# EAGLE board SparkFun_Analog_MEMS_Microphone_Breakout_VM2020-Panel (EAGLE 9.6.2), part 1 of 4
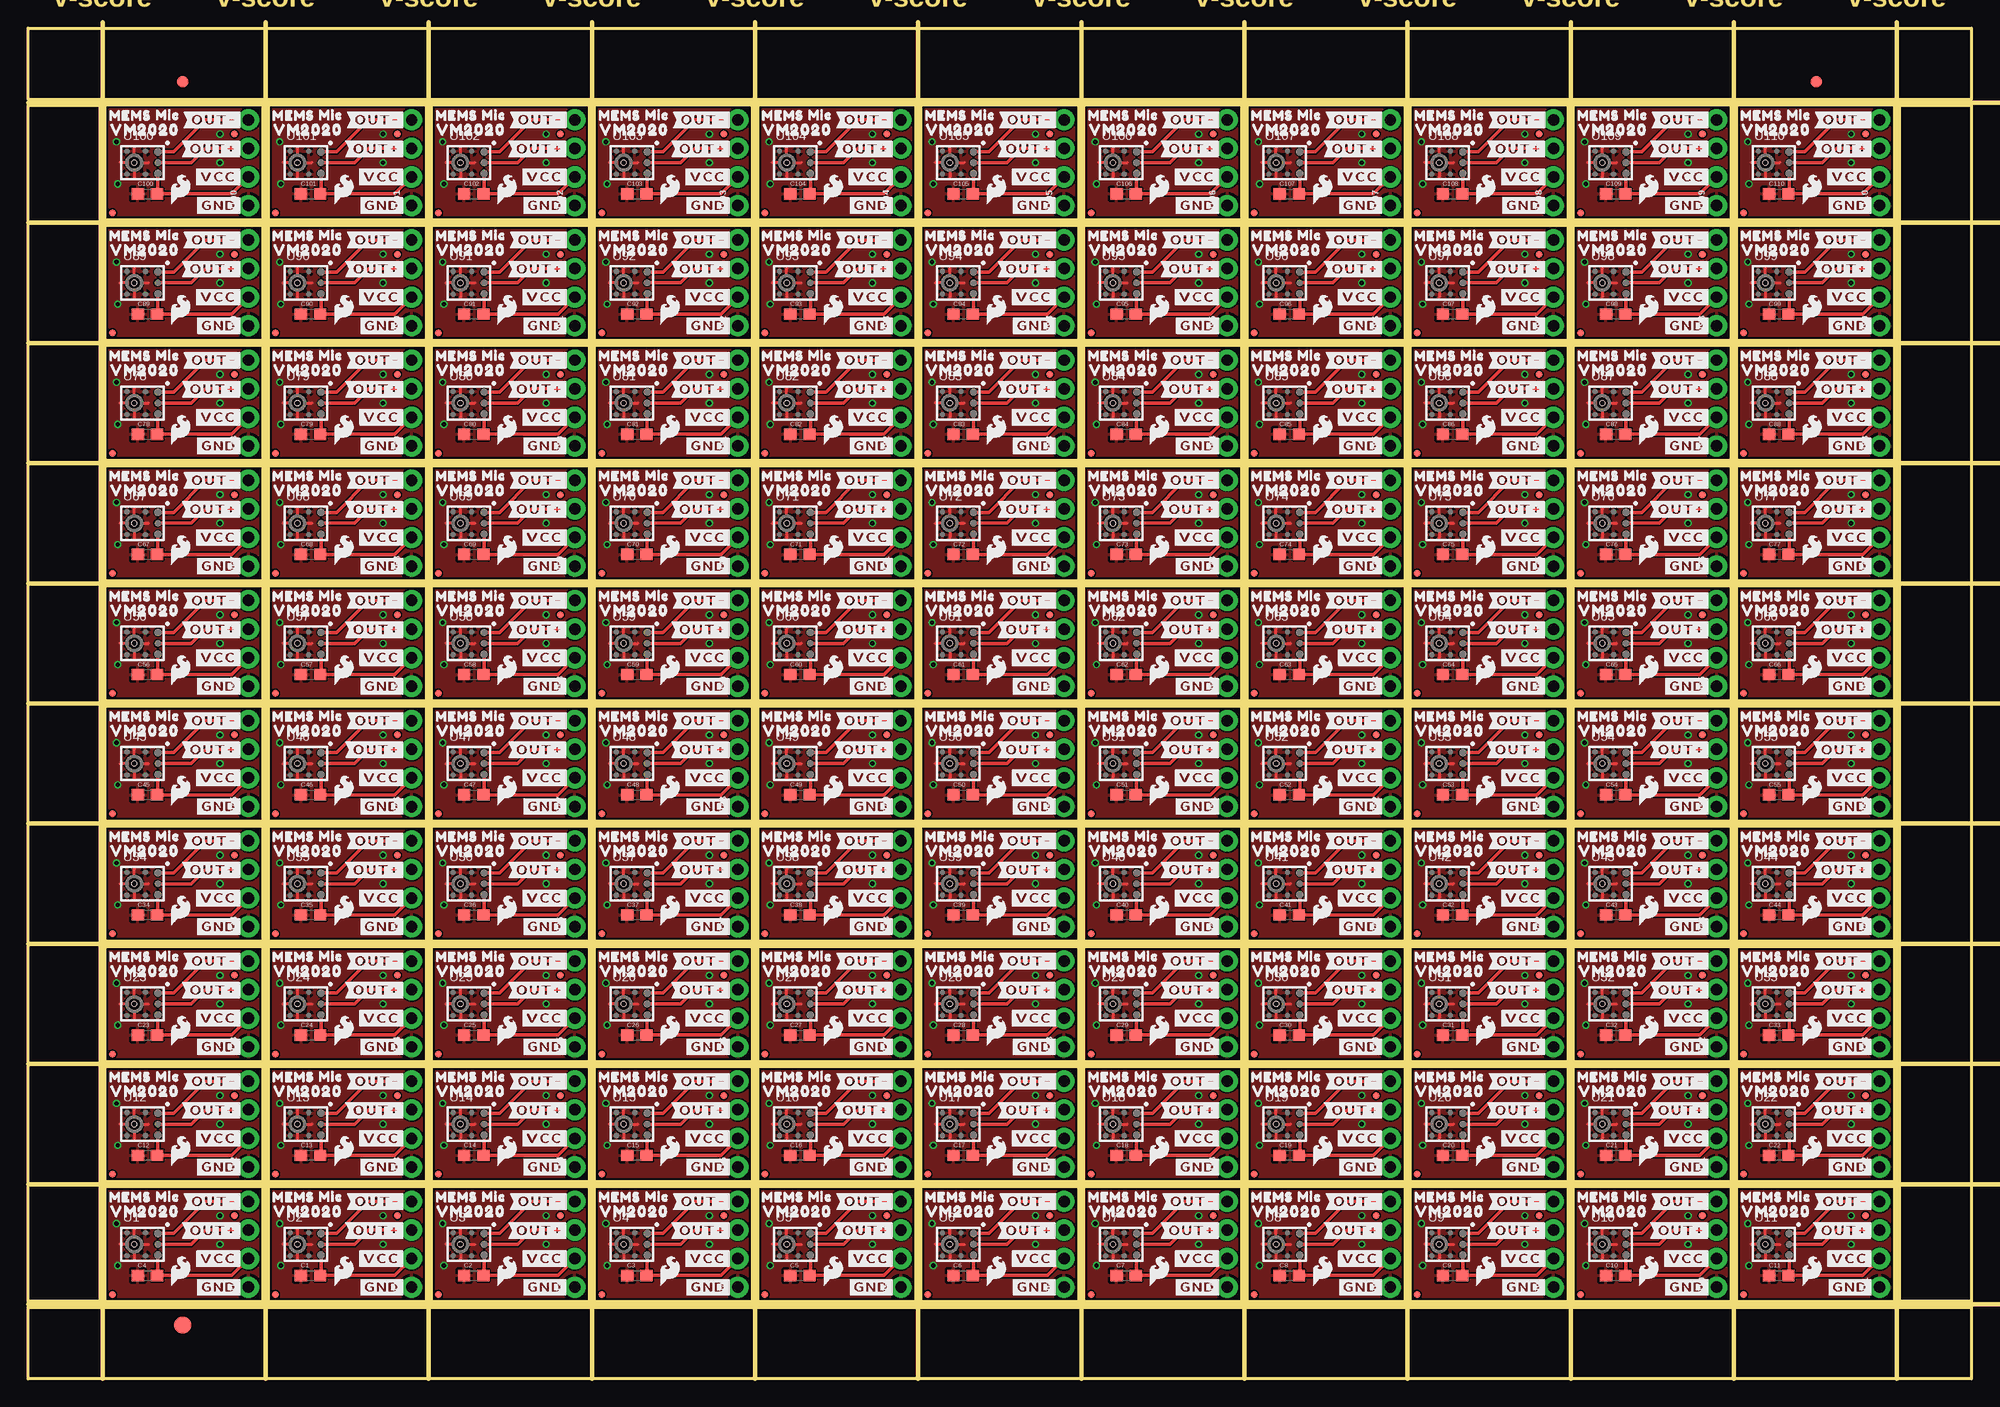
[diagram p0: board, top side]
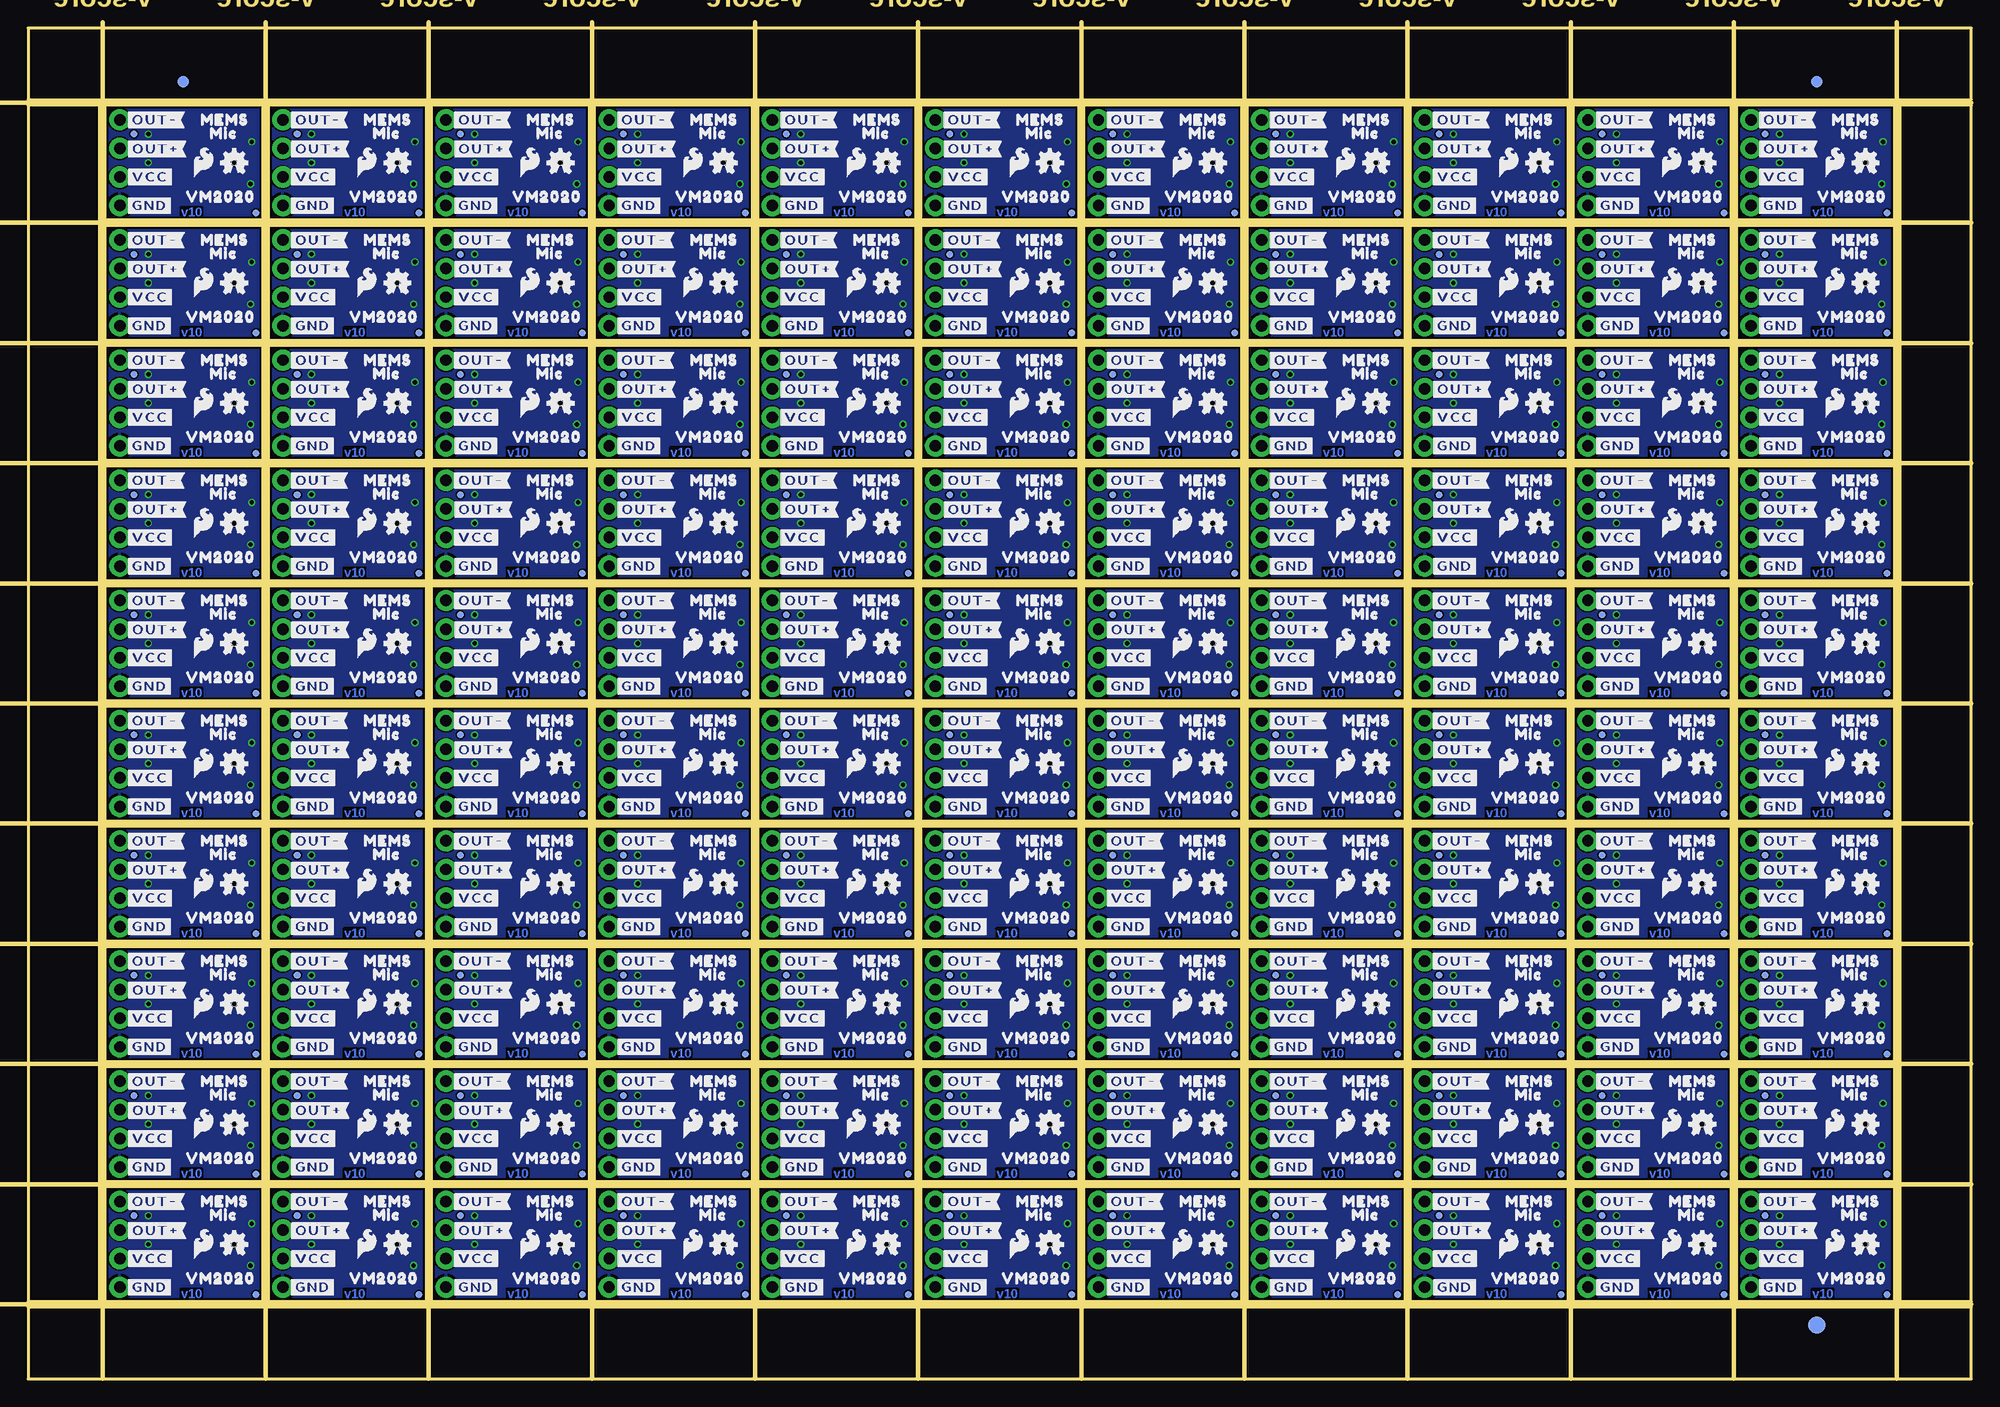
[diagram p1: board, bottom side, seen from below]

Size 172.47 x 119.89 mm. Coordinates in mm from the lower left corner, seen from the top.
Outline: 456 segments
Copper layers (1*16): Top 0.035mm / dielectric 1.5mm / Bottom 0.035mm
Design rules "SparkFun_Analog_MEMS_Microphone_Breakout_VM2020": minimum track width 5mil, minimum drill 0.3mm, track to track 5mil, track to pad 5mil, pad to pad 5mil, via to via 5mil, smd to smd 5mil, copper to edge 7mil, drill to drill 7mil, minimum pad ring 5mil, minimum via ring 5mil, stop-mask expansion 2.5mil, vias tented up to drill 25mil, thermal gap 10mil
Milling: 23 lines

## Footprints (pad centres in the part's own frame; a part is rotated, then mirrored left to right if it is on the bottom)
0603 = smd 1.1 x 1: 1 -0.85,0; 2 0.85,0
FIDUCIAL-1X2 = smd 1 x 1: 1 0,0
FIDUCIAL-1.5X3 = smd 1.5 x 1.5: 1 0,0
FIDUCIAL-MICRO = smd 0.635 x 0.635: 1 0,0
1X04_NO_SILK = drill 1.016 pad 1.88: 1 0,0; 2 2.54,0; 3 5.08,0; 4 7.62,0
VM2020 = smd 0.65 x 0.65: 1 1.35,0.965; 6 1.35,-0.965 | smd 0.46 x 0.46: 2 0.25,1.015; 3 -1.39,1.015; 4 -1.39,-1.015; 5 0.25,-1.015 | smd 0.6 x 0.6: 7 1.35,0 | smd 0.25 x 0.25: 8 -1.38,0 | hole 0.457: -0.75,0

## Placement (x,y rotation side)
C1  0.1uF  [0603]  25.07,9.17 0 top
C2  0.1uF  [0603]  39.55,9.17 0 top
C3  0.1uF  [0603]  54.03,9.17 0 top
C4  0.1uF  [0603]  10.59,9.17 0 top
C5  0.1uF  [0603]  68.5,9.17 0 top
C6  0.1uF  [0603]  82.98,9.17 0 top
C7  0.1uF  [0603]  97.46,9.17 0 top
C8  0.1uF  [0603]  111.94,9.17 0 top
C9  0.1uF  [0603]  126.42,9.17 0 top
C10  0.1uF  [0603]  140.89,9.17 0 top
C11  0.1uF  [0603]  155.37,9.17 0 top
C12  0.1uF  [0603]  10.59,19.84 0 top
C13  0.1uF  [0603]  25.07,19.84 0 top
C14  0.1uF  [0603]  39.55,19.84 0 top
C15  0.1uF  [0603]  54.03,19.84 0 top
C16  0.1uF  [0603]  68.5,19.84 0 top
C17  0.1uF  [0603]  82.98,19.84 0 top
C18  0.1uF  [0603]  97.46,19.84 0 top
C19  0.1uF  [0603]  111.94,19.84 0 top
C20  0.1uF  [0603]  126.42,19.84 0 top
C21  0.1uF  [0603]  140.89,19.84 0 top
C22  0.1uF  [0603]  155.37,19.84 0 top
C23  0.1uF  [0603]  10.59,30.51 0 top
C24  0.1uF  [0603]  25.07,30.51 0 top
C25  0.1uF  [0603]  39.55,30.51 0 top
C26  0.1uF  [0603]  54.03,30.51 0 top
C27  0.1uF  [0603]  68.5,30.51 0 top
C28  0.1uF  [0603]  82.98,30.51 0 top
C29  0.1uF  [0603]  97.46,30.51 0 top
C30  0.1uF  [0603]  111.94,30.51 0 top
C31  0.1uF  [0603]  126.42,30.51 0 top
C32  0.1uF  [0603]  140.89,30.51 0 top
C33  0.1uF  [0603]  155.37,30.51 0 top
C34  0.1uF  [0603]  10.59,41.17 0 top
C35  0.1uF  [0603]  25.07,41.17 0 top
C36  0.1uF  [0603]  39.55,41.17 0 top
C37  0.1uF  [0603]  54.03,41.17 0 top
C38  0.1uF  [0603]  68.5,41.17 0 top
C39  0.1uF  [0603]  82.98,41.17 0 top
C40  0.1uF  [0603]  97.46,41.17 0 top
C41  0.1uF  [0603]  111.94,41.17 0 top
C42  0.1uF  [0603]  126.42,41.17 0 top
C43  0.1uF  [0603]  140.89,41.17 0 top
C44  0.1uF  [0603]  155.37,41.17 0 top
C45  0.1uF  [0603]  10.59,51.84 0 top
C46  0.1uF  [0603]  25.07,51.84 0 top
C47  0.1uF  [0603]  39.55,51.84 0 top
C48  0.1uF  [0603]  54.03,51.84 0 top
C49  0.1uF  [0603]  68.5,51.84 0 top
C50  0.1uF  [0603]  82.98,51.84 0 top
C51  0.1uF  [0603]  97.46,51.84 0 top
C52  0.1uF  [0603]  111.94,51.84 0 top
C53  0.1uF  [0603]  126.42,51.84 0 top
C54  0.1uF  [0603]  140.89,51.84 0 top
C55  0.1uF  [0603]  155.37,51.84 0 top
C56  0.1uF  [0603]  10.59,62.51 0 top
C57  0.1uF  [0603]  25.07,62.51 0 top
C58  0.1uF  [0603]  39.55,62.51 0 top
C59  0.1uF  [0603]  54.03,62.51 0 top
C60  0.1uF  [0603]  68.5,62.51 0 top
C61  0.1uF  [0603]  82.98,62.51 0 top
C62  0.1uF  [0603]  97.46,62.51 0 top
C63  0.1uF  [0603]  111.94,62.51 0 top
C64  0.1uF  [0603]  126.42,62.51 0 top
C65  0.1uF  [0603]  140.89,62.51 0 top
C66  0.1uF  [0603]  155.37,62.51 0 top
C67  0.1uF  [0603]  10.59,73.18 0 top
C68  0.1uF  [0603]  25.07,73.18 0 top
C69  0.1uF  [0603]  39.55,73.18 0 top
C70  0.1uF  [0603]  54.03,73.18 0 top
C71  0.1uF  [0603]  68.5,73.18 0 top
C72  0.1uF  [0603]  82.98,73.18 0 top
C73  0.1uF  [0603]  97.46,73.18 0 top
C74  0.1uF  [0603]  111.94,73.18 0 top
C75  0.1uF  [0603]  126.42,73.18 0 top
C76  0.1uF  [0603]  140.89,73.18 0 top
C77  0.1uF  [0603]  155.37,73.18 0 top
C78  0.1uF  [0603]  10.59,83.85 0 top
C79  0.1uF  [0603]  25.07,83.85 0 top
C80  0.1uF  [0603]  39.55,83.85 0 top
C81  0.1uF  [0603]  54.03,83.85 0 top
C82  0.1uF  [0603]  68.5,83.85 0 top
C83  0.1uF  [0603]  82.98,83.85 0 top
C84  0.1uF  [0603]  97.46,83.85 0 top
C85  0.1uF  [0603]  111.94,83.85 0 top
C86  0.1uF  [0603]  126.42,83.85 0 top
C87  0.1uF  [0603]  140.89,83.85 0 top
C88  0.1uF  [0603]  155.37,83.85 0 top
C89  0.1uF  [0603]  10.59,94.51 0 top
C90  0.1uF  [0603]  25.07,94.51 0 top
C91  0.1uF  [0603]  39.55,94.51 0 top
C92  0.1uF  [0603]  54.03,94.51 0 top
C93  0.1uF  [0603]  68.5,94.51 0 top
C94  0.1uF  [0603]  82.98,94.51 0 top
C95  0.1uF  [0603]  97.46,94.51 0 top
C96  0.1uF  [0603]  111.94,94.51 0 top
C97  0.1uF  [0603]  126.42,94.51 0 top
C98  0.1uF  [0603]  140.89,94.51 0 top
C99  0.1uF  [0603]  155.37,94.51 0 top
C100  0.1uF  [0603]  10.59,105.18 0 top
C101  0.1uF  [0603]  25.07,105.18 0 top
C102  0.1uF  [0603]  39.55,105.18 0 top
C103  0.1uF  [0603]  54.03,105.18 0 top
C104  0.1uF  [0603]  68.5,105.18 0 top
C105  0.1uF  [0603]  82.98,105.18 0 top
C106  0.1uF  [0603]  97.46,105.18 0 top
C107  0.1uF  [0603]  111.94,105.18 0 top
C108  0.1uF  [0603]  126.42,105.18 0 top
C109  0.1uF  [0603]  140.89,105.18 0 top
C110  0.1uF  [0603]  155.37,105.18 0 top
E$1  [FIDUCIAL-1X2]  13.72,115.13 0 top
E$2  [FIDUCIAL-1X2]  13.72,115.13 0 bottom
E$3  [FIDUCIAL-1X2]  158.69,115.13 0 top
E$4  [FIDUCIAL-1X2]  158.69,115.13 0 bottom
E$5  [FIDUCIAL-1.5X3]  13.72,4.76 0 top
E$6  [FIDUCIAL-1.5X3]  13.72,4.76 0 bottom
FD1  FIDUCIALUFIDUCIAL  [FIDUCIAL-MICRO]  18.29,14.48 0 top
FD2  FIDUCIALUFIDUCIAL  [FIDUCIAL-MICRO]  18.29,14.48 0 bottom
FD3  FIDUCIALUFIDUCIAL  [FIDUCIAL-MICRO]  7.47,7.49 0 top
FD4  FIDUCIALUFIDUCIAL  [FIDUCIAL-MICRO]  7.47,7.49 0 bottom
FD5  FIDUCIALUFIDUCIAL  [FIDUCIAL-MICRO]  32.77,14.48 0 top
FD6  FIDUCIALUFIDUCIAL  [FIDUCIAL-MICRO]  32.77,14.48 0 bottom
FD7  FIDUCIALUFIDUCIAL  [FIDUCIAL-MICRO]  21.95,7.49 0 top
FD8  FIDUCIALUFIDUCIAL  [FIDUCIAL-MICRO]  21.95,7.49 0 bottom
FD9  FIDUCIALUFIDUCIAL  [FIDUCIAL-MICRO]  47.24,14.48 0 top
FD10  FIDUCIALUFIDUCIAL  [FIDUCIAL-MICRO]  47.24,14.48 0 bottom
FD11  FIDUCIALUFIDUCIAL  [FIDUCIAL-MICRO]  36.42,7.49 0 top
FD12  FIDUCIALUFIDUCIAL  [FIDUCIAL-MICRO]  36.42,7.49 0 bottom
FD13  FIDUCIALUFIDUCIAL  [FIDUCIAL-MICRO]  61.72,14.48 0 top
FD14  FIDUCIALUFIDUCIAL  [FIDUCIAL-MICRO]  61.72,14.48 0 bottom
FD15  FIDUCIALUFIDUCIAL  [FIDUCIAL-MICRO]  50.9,7.49 0 top
FD16  FIDUCIALUFIDUCIAL  [FIDUCIAL-MICRO]  50.9,7.49 0 bottom
FD17  FIDUCIALUFIDUCIAL  [FIDUCIAL-MICRO]  76.2,14.48 0 top
FD18  FIDUCIALUFIDUCIAL  [FIDUCIAL-MICRO]  76.2,14.48 0 bottom
FD19  FIDUCIALUFIDUCIAL  [FIDUCIAL-MICRO]  65.38,7.49 0 top
FD20  FIDUCIALUFIDUCIAL  [FIDUCIAL-MICRO]  65.38,7.49 0 bottom
FD21  FIDUCIALUFIDUCIAL  [FIDUCIAL-MICRO]  90.68,14.48 0 top
FD22  FIDUCIALUFIDUCIAL  [FIDUCIAL-MICRO]  90.68,14.48 0 bottom
FD23  FIDUCIALUFIDUCIAL  [FIDUCIAL-MICRO]  79.86,7.49 0 top
FD24  FIDUCIALUFIDUCIAL  [FIDUCIAL-MICRO]  79.86,7.49 0 bottom
FD25  FIDUCIALUFIDUCIAL  [FIDUCIAL-MICRO]  105.16,14.48 0 top
FD26  FIDUCIALUFIDUCIAL  [FIDUCIAL-MICRO]  105.16,14.48 0 bottom
FD27  FIDUCIALUFIDUCIAL  [FIDUCIAL-MICRO]  94.34,7.49 0 top
FD28  FIDUCIALUFIDUCIAL  [FIDUCIAL-MICRO]  94.34,7.49 0 bottom
FD29  FIDUCIALUFIDUCIAL  [FIDUCIAL-MICRO]  119.63,14.48 0 top
FD30  FIDUCIALUFIDUCIAL  [FIDUCIAL-MICRO]  119.63,14.48 0 bottom
FD31  FIDUCIALUFIDUCIAL  [FIDUCIAL-MICRO]  108.81,7.49 0 top
FD32  FIDUCIALUFIDUCIAL  [FIDUCIAL-MICRO]  108.81,7.49 0 bottom
FD33  FIDUCIALUFIDUCIAL  [FIDUCIAL-MICRO]  134.11,14.48 0 top
FD34  FIDUCIALUFIDUCIAL  [FIDUCIAL-MICRO]  134.11,14.48 0 bottom
FD35  FIDUCIALUFIDUCIAL  [FIDUCIAL-MICRO]  123.29,7.49 0 top
FD36  FIDUCIALUFIDUCIAL  [FIDUCIAL-MICRO]  123.29,7.49 0 bottom
FD37  FIDUCIALUFIDUCIAL  [FIDUCIAL-MICRO]  148.59,14.48 0 top
FD38  FIDUCIALUFIDUCIAL  [FIDUCIAL-MICRO]  148.59,14.48 0 bottom
FD39  FIDUCIALUFIDUCIAL  [FIDUCIAL-MICRO]  137.77,7.49 0 top
FD40  FIDUCIALUFIDUCIAL  [FIDUCIAL-MICRO]  137.77,7.49 0 bottom
FD41  FIDUCIALUFIDUCIAL  [FIDUCIAL-MICRO]  163.07,14.48 0 top
FD42  FIDUCIALUFIDUCIAL  [FIDUCIAL-MICRO]  163.07,14.48 0 bottom
FD43  FIDUCIALUFIDUCIAL  [FIDUCIAL-MICRO]  152.25,7.49 0 top
FD44  FIDUCIALUFIDUCIAL  [FIDUCIAL-MICRO]  152.25,7.49 0 bottom
FD45  FIDUCIALUFIDUCIAL  [FIDUCIAL-MICRO]  18.29,25.15 0 top
FD46  FIDUCIALUFIDUCIAL  [FIDUCIAL-MICRO]  18.29,25.15 0 bottom
FD47  FIDUCIALUFIDUCIAL  [FIDUCIAL-MICRO]  7.47,18.16 0 top
FD48  FIDUCIALUFIDUCIAL  [FIDUCIAL-MICRO]  7.47,18.16 0 bottom
FD49  FIDUCIALUFIDUCIAL  [FIDUCIAL-MICRO]  32.77,25.15 0 top
FD50  FIDUCIALUFIDUCIAL  [FIDUCIAL-MICRO]  32.77,25.15 0 bottom
FD51  FIDUCIALUFIDUCIAL  [FIDUCIAL-MICRO]  21.95,18.16 0 top
FD52  FIDUCIALUFIDUCIAL  [FIDUCIAL-MICRO]  21.95,18.16 0 bottom
FD53  FIDUCIALUFIDUCIAL  [FIDUCIAL-MICRO]  47.24,25.15 0 top
FD54  FIDUCIALUFIDUCIAL  [FIDUCIAL-MICRO]  47.24,25.15 0 bottom
FD55  FIDUCIALUFIDUCIAL  [FIDUCIAL-MICRO]  36.42,18.16 0 top
FD56  FIDUCIALUFIDUCIAL  [FIDUCIAL-MICRO]  36.42,18.16 0 bottom
FD57  FIDUCIALUFIDUCIAL  [FIDUCIAL-MICRO]  61.72,25.15 0 top
FD58  FIDUCIALUFIDUCIAL  [FIDUCIAL-MICRO]  61.72,25.15 0 bottom
FD59  FIDUCIALUFIDUCIAL  [FIDUCIAL-MICRO]  50.9,18.16 0 top
FD60  FIDUCIALUFIDUCIAL  [FIDUCIAL-MICRO]  50.9,18.16 0 bottom
FD61  FIDUCIALUFIDUCIAL  [FIDUCIAL-MICRO]  76.2,25.15 0 top
FD62  FIDUCIALUFIDUCIAL  [FIDUCIAL-MICRO]  76.2,25.15 0 bottom
FD63  FIDUCIALUFIDUCIAL  [FIDUCIAL-MICRO]  65.38,18.16 0 top
FD64  FIDUCIALUFIDUCIAL  [FIDUCIAL-MICRO]  65.38,18.16 0 bottom
FD65  FIDUCIALUFIDUCIAL  [FIDUCIAL-MICRO]  90.68,25.15 0 top
FD66  FIDUCIALUFIDUCIAL  [FIDUCIAL-MICRO]  90.68,25.15 0 bottom
FD67  FIDUCIALUFIDUCIAL  [FIDUCIAL-MICRO]  79.86,18.16 0 top
FD68  FIDUCIALUFIDUCIAL  [FIDUCIAL-MICRO]  79.86,18.16 0 bottom
FD69  FIDUCIALUFIDUCIAL  [FIDUCIAL-MICRO]  105.16,25.15 0 top
FD70  FIDUCIALUFIDUCIAL  [FIDUCIAL-MICRO]  105.16,25.15 0 bottom
FD71  FIDUCIALUFIDUCIAL  [FIDUCIAL-MICRO]  94.34,18.16 0 top
FD72  FIDUCIALUFIDUCIAL  [FIDUCIAL-MICRO]  94.34,18.16 0 bottom
FD73  FIDUCIALUFIDUCIAL  [FIDUCIAL-MICRO]  119.63,25.15 0 top
FD74  FIDUCIALUFIDUCIAL  [FIDUCIAL-MICRO]  119.63,25.15 0 bottom
FD75  FIDUCIALUFIDUCIAL  [FIDUCIAL-MICRO]  108.81,18.16 0 top
FD76  FIDUCIALUFIDUCIAL  [FIDUCIAL-MICRO]  108.81,18.16 0 bottom
FD77  FIDUCIALUFIDUCIAL  [FIDUCIAL-MICRO]  134.11,25.15 0 top
FD78  FIDUCIALUFIDUCIAL  [FIDUCIAL-MICRO]  134.11,25.15 0 bottom
FD79  FIDUCIALUFIDUCIAL  [FIDUCIAL-MICRO]  123.29,18.16 0 top
FD80  FIDUCIALUFIDUCIAL  [FIDUCIAL-MICRO]  123.29,18.16 0 bottom
FD81  FIDUCIALUFIDUCIAL  [FIDUCIAL-MICRO]  148.59,25.15 0 top
FD82  FIDUCIALUFIDUCIAL  [FIDUCIAL-MICRO]  148.59,25.15 0 bottom
FD83  FIDUCIALUFIDUCIAL  [FIDUCIAL-MICRO]  137.77,18.16 0 top
FD84  FIDUCIALUFIDUCIAL  [FIDUCIAL-MICRO]  137.77,18.16 0 bottom
FD85  FIDUCIALUFIDUCIAL  [FIDUCIAL-MICRO]  163.07,25.15 0 top
FD86  FIDUCIALUFIDUCIAL  [FIDUCIAL-MICRO]  163.07,25.15 0 bottom
FD87  FIDUCIALUFIDUCIAL  [FIDUCIAL-MICRO]  152.25,18.16 0 top
FD88  FIDUCIALUFIDUCIAL  [FIDUCIAL-MICRO]  152.25,18.16 0 bottom
FD89  FIDUCIALUFIDUCIAL  [FIDUCIAL-MICRO]  18.29,35.81 0 top
FD90  FIDUCIALUFIDUCIAL  [FIDUCIAL-MICRO]  18.29,35.81 0 bottom
FD91  FIDUCIALUFIDUCIAL  [FIDUCIAL-MICRO]  7.47,28.83 0 top
FD92  FIDUCIALUFIDUCIAL  [FIDUCIAL-MICRO]  7.47,28.83 0 bottom
FD93  FIDUCIALUFIDUCIAL  [FIDUCIAL-MICRO]  32.77,35.81 0 top
FD94  FIDUCIALUFIDUCIAL  [FIDUCIAL-MICRO]  32.77,35.81 0 bottom
FD95  FIDUCIALUFIDUCIAL  [FIDUCIAL-MICRO]  21.95,28.83 0 top
FD96  FIDUCIALUFIDUCIAL  [FIDUCIAL-MICRO]  21.95,28.83 0 bottom
FD97  FIDUCIALUFIDUCIAL  [FIDUCIAL-MICRO]  47.24,35.81 0 top
FD98  FIDUCIALUFIDUCIAL  [FIDUCIAL-MICRO]  47.24,35.81 0 bottom
FD99  FIDUCIALUFIDUCIAL  [FIDUCIAL-MICRO]  36.42,28.83 0 top
FD100  FIDUCIALUFIDUCIAL  [FIDUCIAL-MICRO]  36.42,28.83 0 bottom
FD101  FIDUCIALUFIDUCIAL  [FIDUCIAL-MICRO]  61.72,35.81 0 top
FD102  FIDUCIALUFIDUCIAL  [FIDUCIAL-MICRO]  61.72,35.81 0 bottom
FD103  FIDUCIALUFIDUCIAL  [FIDUCIAL-MICRO]  50.9,28.83 0 top
FD104  FIDUCIALUFIDUCIAL  [FIDUCIAL-MICRO]  50.9,28.83 0 bottom
FD105  FIDUCIALUFIDUCIAL  [FIDUCIAL-MICRO]  76.2,35.81 0 top
FD106  FIDUCIALUFIDUCIAL  [FIDUCIAL-MICRO]  76.2,35.81 0 bottom
FD107  FIDUCIALUFIDUCIAL  [FIDUCIAL-MICRO]  65.38,28.83 0 top
FD108  FIDUCIALUFIDUCIAL  [FIDUCIAL-MICRO]  65.38,28.83 0 bottom
FD109  FIDUCIALUFIDUCIAL  [FIDUCIAL-MICRO]  90.68,35.81 0 top
FD110  FIDUCIALUFIDUCIAL  [FIDUCIAL-MICRO]  90.68,35.81 0 bottom
FD111  FIDUCIALUFIDUCIAL  [FIDUCIAL-MICRO]  79.86,28.83 0 top
FD112  FIDUCIALUFIDUCIAL  [FIDUCIAL-MICRO]  79.86,28.83 0 bottom
FD113  FIDUCIALUFIDUCIAL  [FIDUCIAL-MICRO]  105.16,35.81 0 top
FD114  FIDUCIALUFIDUCIAL  [FIDUCIAL-MICRO]  105.16,35.81 0 bottom
FD115  FIDUCIALUFIDUCIAL  [FIDUCIAL-MICRO]  94.34,28.83 0 top
FD116  FIDUCIALUFIDUCIAL  [FIDUCIAL-MICRO]  94.34,28.83 0 bottom
FD117  FIDUCIALUFIDUCIAL  [FIDUCIAL-MICRO]  119.63,35.81 0 top
FD118  FIDUCIALUFIDUCIAL  [FIDUCIAL-MICRO]  119.63,35.81 0 bottom
FD119  FIDUCIALUFIDUCIAL  [FIDUCIAL-MICRO]  108.81,28.83 0 top
FD120  FIDUCIALUFIDUCIAL  [FIDUCIAL-MICRO]  108.81,28.83 0 bottom
FD121  FIDUCIALUFIDUCIAL  [FIDUCIAL-MICRO]  134.11,35.81 0 top
FD122  FIDUCIALUFIDUCIAL  [FIDUCIAL-MICRO]  134.11,35.81 0 bottom
FD123  FIDUCIALUFIDUCIAL  [FIDUCIAL-MICRO]  123.29,28.83 0 top
FD124  FIDUCIALUFIDUCIAL  [FIDUCIAL-MICRO]  123.29,28.83 0 bottom
FD125  FIDUCIALUFIDUCIAL  [FIDUCIAL-MICRO]  148.59,35.81 0 top
FD126  FIDUCIALUFIDUCIAL  [FIDUCIAL-MICRO]  148.59,35.81 0 bottom
FD127  FIDUCIALUFIDUCIAL  [FIDUCIAL-MICRO]  137.77,28.83 0 top
FD128  FIDUCIALUFIDUCIAL  [FIDUCIAL-MICRO]  137.77,28.83 0 bottom
FD129  FIDUCIALUFIDUCIAL  [FIDUCIAL-MICRO]  163.07,35.81 0 top
FD130  FIDUCIALUFIDUCIAL  [FIDUCIAL-MICRO]  163.07,35.81 0 bottom
FD131  FIDUCIALUFIDUCIAL  [FIDUCIAL-MICRO]  152.25,28.83 0 top
FD132  FIDUCIALUFIDUCIAL  [FIDUCIAL-MICRO]  152.25,28.83 0 bottom
FD133  FIDUCIALUFIDUCIAL  [FIDUCIAL-MICRO]  18.29,46.48 0 top
FD134  FIDUCIALUFIDUCIAL  [FIDUCIAL-MICRO]  18.29,46.48 0 bottom
FD135  FIDUCIALUFIDUCIAL  [FIDUCIAL-MICRO]  7.47,39.5 0 top
FD136  FIDUCIALUFIDUCIAL  [FIDUCIAL-MICRO]  7.47,39.5 0 bottom
FD137  FIDUCIALUFIDUCIAL  [FIDUCIAL-MICRO]  32.77,46.48 0 top
FD138  FIDUCIALUFIDUCIAL  [FIDUCIAL-MICRO]  32.77,46.48 0 bottom
FD139  FIDUCIALUFIDUCIAL  [FIDUCIAL-MICRO]  21.95,39.5 0 top
FD140  FIDUCIALUFIDUCIAL  [FIDUCIAL-MICRO]  21.95,39.5 0 bottom
FD141  FIDUCIALUFIDUCIAL  [FIDUCIAL-MICRO]  47.24,46.48 0 top
FD142  FIDUCIALUFIDUCIAL  [FIDUCIAL-MICRO]  47.24,46.48 0 bottom
FD143  FIDUCIALUFIDUCIAL  [FIDUCIAL-MICRO]  36.42,39.5 0 top
FD144  FIDUCIALUFIDUCIAL  [FIDUCIAL-MICRO]  36.42,39.5 0 bottom
FD145  FIDUCIALUFIDUCIAL  [FIDUCIAL-MICRO]  61.72,46.48 0 top
FD146  FIDUCIALUFIDUCIAL  [FIDUCIAL-MICRO]  61.72,46.48 0 bottom
FD147  FIDUCIALUFIDUCIAL  [FIDUCIAL-MICRO]  50.9,39.5 0 top
FD148  FIDUCIALUFIDUCIAL  [FIDUCIAL-MICRO]  50.9,39.5 0 bottom
FD149  FIDUCIALUFIDUCIAL  [FIDUCIAL-MICRO]  76.2,46.48 0 top
FD150  FIDUCIALUFIDUCIAL  [FIDUCIAL-MICRO]  76.2,46.48 0 bottom
FD151  FIDUCIALUFIDUCIAL  [FIDUCIAL-MICRO]  65.38,39.5 0 top
FD152  FIDUCIALUFIDUCIAL  [FIDUCIAL-MICRO]  65.38,39.5 0 bottom
FD153  FIDUCIALUFIDUCIAL  [FIDUCIAL-MICRO]  90.68,46.48 0 top
FD154  FIDUCIALUFIDUCIAL  [FIDUCIAL-MICRO]  90.68,46.48 0 bottom
FD155  FIDUCIALUFIDUCIAL  [FIDUCIAL-MICRO]  79.86,39.5 0 top
FD156  FIDUCIALUFIDUCIAL  [FIDUCIAL-MICRO]  79.86,39.5 0 bottom
FD157  FIDUCIALUFIDUCIAL  [FIDUCIAL-MICRO]  105.16,46.48 0 top
FD158  FIDUCIALUFIDUCIAL  [FIDUCIAL-MICRO]  105.16,46.48 0 bottom
FD159  FIDUCIALUFIDUCIAL  [FIDUCIAL-MICRO]  94.34,39.5 0 top
FD160  FIDUCIALUFIDUCIAL  [FIDUCIAL-MICRO]  94.34,39.5 0 bottom
FD161  FIDUCIALUFIDUCIAL  [FIDUCIAL-MICRO]  119.63,46.48 0 top
FD162  FIDUCIALUFIDUCIAL  [FIDUCIAL-MICRO]  119.63,46.48 0 bottom
FD163  FIDUCIALUFIDUCIAL  [FIDUCIAL-MICRO]  108.81,39.5 0 top
FD164  FIDUCIALUFIDUCIAL  [FIDUCIAL-MICRO]  108.81,39.5 0 bottom
FD165  FIDUCIALUFIDUCIAL  [FIDUCIAL-MICRO]  134.11,46.48 0 top
FD166  FIDUCIALUFIDUCIAL  [FIDUCIAL-MICRO]  134.11,46.48 0 bottom
FD167  FIDUCIALUFIDUCIAL  [FIDUCIAL-MICRO]  123.29,39.5 0 top
FD168  FIDUCIALUFIDUCIAL  [FIDUCIAL-MICRO]  123.29,39.5 0 bottom
FD169  FIDUCIALUFIDUCIAL  [FIDUCIAL-MICRO]  148.59,46.48 0 top
FD170  FIDUCIALUFIDUCIAL  [FIDUCIAL-MICRO]  148.59,46.48 0 bottom
FD171  FIDUCIALUFIDUCIAL  [FIDUCIAL-MICRO]  137.77,39.5 0 top
FD172  FIDUCIALUFIDUCIAL  [FIDUCIAL-MICRO]  137.77,39.5 0 bottom
FD173  FIDUCIALUFIDUCIAL  [FIDUCIAL-MICRO]  163.07,46.48 0 top
FD174  FIDUCIALUFIDUCIAL  [FIDUCIAL-MICRO]  163.07,46.48 0 bottom
FD175  FIDUCIALUFIDUCIAL  [FIDUCIAL-MICRO]  152.25,39.5 0 top
FD176  FIDUCIALUFIDUCIAL  [FIDUCIAL-MICRO]  152.25,39.5 0 bottom
FD177  FIDUCIALUFIDUCIAL  [FIDUCIAL-MICRO]  18.29,57.15 0 top
FD178  FIDUCIALUFIDUCIAL  [FIDUCIAL-MICRO]  18.29,57.15 0 bottom
FD179  FIDUCIALUFIDUCIAL  [FIDUCIAL-MICRO]  7.47,50.16 0 top
FD180  FIDUCIALUFIDUCIAL  [FIDUCIAL-MICRO]  7.47,50.16 0 bottom
FD181  FIDUCIALUFIDUCIAL  [FIDUCIAL-MICRO]  32.77,57.15 0 top
FD182  FIDUCIALUFIDUCIAL  [FIDUCIAL-MICRO]  32.77,57.15 0 bottom
FD183  FIDUCIALUFIDUCIAL  [FIDUCIAL-MICRO]  21.95,50.16 0 top
FD184  FIDUCIALUFIDUCIAL  [FIDUCIAL-MICRO]  21.95,50.16 0 bottom
FD185  FIDUCIALUFIDUCIAL  [FIDUCIAL-MICRO]  47.24,57.15 0 top
FD186  FIDUCIALUFIDUCIAL  [FIDUCIAL-MICRO]  47.24,57.15 0 bottom
FD187  FIDUCIALUFIDUCIAL  [FIDUCIAL-MICRO]  36.42,50.16 0 top
FD188  FIDUCIALUFIDUCIAL  [FIDUCIAL-MICRO]  36.42,50.16 0 bottom
FD189  FIDUCIALUFIDUCIAL  [FIDUCIAL-MICRO]  61.72,57.15 0 top
FD190  FIDUCIALUFIDUCIAL  [FIDUCIAL-MICRO]  61.72,57.15 0 bottom
FD191  FIDUCIALUFIDUCIAL  [FIDUCIAL-MICRO]  50.9,50.16 0 top
FD192  FIDUCIALUFIDUCIAL  [FIDUCIAL-MICRO]  50.9,50.16 0 bottom
FD193  FIDUCIALUFIDUCIAL  [FIDUCIAL-MICRO]  76.2,57.15 0 top
FD194  FIDUCIALUFIDUCIAL  [FIDUCIAL-MICRO]  76.2,57.15 0 bottom
FD195  FIDUCIALUFIDUCIAL  [FIDUCIAL-MICRO]  65.38,50.16 0 top
FD196  FIDUCIALUFIDUCIAL  [FIDUCIAL-MICRO]  65.38,50.16 0 bottom
FD197  FIDUCIALUFIDUCIAL  [FIDUCIAL-MICRO]  90.68,57.15 0 top
FD198  FIDUCIALUFIDUCIAL  [FIDUCIAL-MICRO]  90.68,57.15 0 bottom
FD199  FIDUCIALUFIDUCIAL  [FIDUCIAL-MICRO]  79.86,50.16 0 top
FD200  FIDUCIALUFIDUCIAL  [FIDUCIAL-MICRO]  79.86,50.16 0 bottom
FD201  FIDUCIALUFIDUCIAL  [FIDUCIAL-MICRO]  105.16,57.15 0 top
FD202  FIDUCIALUFIDUCIAL  [FIDUCIAL-MICRO]  105.16,57.15 0 bottom
FD203  FIDUCIALUFIDUCIAL  [FIDUCIAL-MICRO]  94.34,50.16 0 top
FD204  FIDUCIALUFIDUCIAL  [FIDUCIAL-MICRO]  94.34,50.16 0 bottom
FD205  FIDUCIALUFIDUCIAL  [FIDUCIAL-MICRO]  119.63,57.15 0 top
FD206  FIDUCIALUFIDUCIAL  [FIDUCIAL-MICRO]  119.63,57.15 0 bottom
FD207  FIDUCIALUFIDUCIAL  [FIDUCIAL-MICRO]  108.81,50.16 0 top
FD208  FIDUCIALUFIDUCIAL  [FIDUCIAL-MICRO]  108.81,50.16 0 bottom
FD209  FIDUCIALUFIDUCIAL  [FIDUCIAL-MICRO]  134.11,57.15 0 top
FD210  FIDUCIALUFIDUCIAL  [FIDUCIAL-MICRO]  134.11,57.15 0 bottom
FD211  FIDUCIALUFIDUCIAL  [FIDUCIAL-MICRO]  123.29,50.16 0 top
FD212  FIDUCIALUFIDUCIAL  [FIDUCIAL-MICRO]  123.29,50.16 0 bottom
FD213  FIDUCIALUFIDUCIAL  [FIDUCIAL-MICRO]  148.59,57.15 0 top
FD214  FIDUCIALUFIDUCIAL  [FIDUCIAL-MICRO]  148.59,57.15 0 bottom
FD215  FIDUCIALUFIDUCIAL  [FIDUCIAL-MICRO]  137.77,50.16 0 top
FD216  FIDUCIALUFIDUCIAL  [FIDUCIAL-MICRO]  137.77,50.16 0 bottom
FD217  FIDUCIALUFIDUCIAL  [FIDUCIAL-MICRO]  163.07,57.15 0 top
FD218  FIDUCIALUFIDUCIAL  [FIDUCIAL-MICRO]  163.07,57.15 0 bottom
FD219  FIDUCIALUFIDUCIAL  [FIDUCIAL-MICRO]  152.25,50.16 0 top
FD220  FIDUCIALUFIDUCIAL  [FIDUCIAL-MICRO]  152.25,50.16 0 bottom
FD221  FIDUCIALUFIDUCIAL  [FIDUCIAL-MICRO]  18.29,67.82 0 top
FD222  FIDUCIALUFIDUCIAL  [FIDUCIAL-MICRO]  18.29,67.82 0 bottom
FD223  FIDUCIALUFIDUCIAL  [FIDUCIAL-MICRO]  7.47,60.83 0 top
FD224  FIDUCIALUFIDUCIAL  [FIDUCIAL-MICRO]  7.47,60.83 0 bottom
FD225  FIDUCIALUFIDUCIAL  [FIDUCIAL-MICRO]  32.77,67.82 0 top
FD226  FIDUCIALUFIDUCIAL  [FIDUCIAL-MICRO]  32.77,67.82 0 bottom
FD227  FIDUCIALUFIDUCIAL  [FIDUCIAL-MICRO]  21.95,60.83 0 top
FD228  FIDUCIALUFIDUCIAL  [FIDUCIAL-MICRO]  21.95,60.83 0 bottom
FD229  FIDUCIALUFIDUCIAL  [FIDUCIAL-MICRO]  47.24,67.82 0 top
FD230  FIDUCIALUFIDUCIAL  [FIDUCIAL-MICRO]  47.24,67.82 0 bottom
FD231  FIDUCIALUFIDUCIAL  [FIDUCIAL-MICRO]  36.42,60.83 0 top
FD232  FIDUCIALUFIDUCIAL  [FIDUCIAL-MICRO]  36.42,60.83 0 bottom
FD233  FIDUCIALUFIDUCIAL  [FIDUCIAL-MICRO]  61.72,67.82 0 top
FD234  FIDUCIALUFIDUCIAL  [FIDUCIAL-MICRO]  61.72,67.82 0 bottom
FD235  FIDUCIALUFIDUCIAL  [FIDUCIAL-MICRO]  50.9,60.83 0 top
FD236  FIDUCIALUFIDUCIAL  [FIDUCIAL-MICRO]  50.9,60.83 0 bottom
FD237  FIDUCIALUFIDUCIAL  [FIDUCIAL-MICRO]  76.2,67.82 0 top
FD238  FIDUCIALUFIDUCIAL  [FIDUCIAL-MICRO]  76.2,67.82 0 bottom
FD239  FIDUCIALUFIDUCIAL  [FIDUCIAL-MICRO]  65.38,60.83 0 top
FD240  FIDUCIALUFIDUCIAL  [FIDUCIAL-MICRO]  65.38,60.83 0 bottom
FD241  FIDUCIALUFIDUCIAL  [FIDUCIAL-MICRO]  90.68,67.82 0 top
FD242  FIDUCIALUFIDUCIAL  [FIDUCIAL-MICRO]  90.68,67.82 0 bottom
FD243  FIDUCIALUFIDUCIAL  [FIDUCIAL-MICRO]  79.86,60.83 0 top
FD244  FIDUCIALUFIDUCIAL  [FIDUCIAL-MICRO]  79.86,60.83 0 bottom
FD245  FIDUCIALUFIDUCIAL  [FIDUCIAL-MICRO]  105.16,67.82 0 top
FD246  FIDUCIALUFIDUCIAL  [FIDUCIAL-MICRO]  105.16,67.82 0 bottom
FD247  FIDUCIALUFIDUCIAL  [FIDUCIAL-MICRO]  94.34,60.83 0 top
FD248  FIDUCIALUFIDUCIAL  [FIDUCIAL-MICRO]  94.34,60.83 0 bottom
FD249  FIDUCIALUFIDUCIAL  [FIDUCIAL-MICRO]  119.63,67.82 0 top
FD250  FIDUCIALUFIDUCIAL  [FIDUCIAL-MICRO]  119.63,67.82 0 bottom
FD251  FIDUCIALUFIDUCIAL  [FIDUCIAL-MICRO]  108.81,60.83 0 top
FD252  FIDUCIALUFIDUCIAL  [FIDUCIAL-MICRO]  108.81,60.83 0 bottom
FD253  FIDUCIALUFIDUCIAL  [FIDUCIAL-MICRO]  134.11,67.82 0 top
FD254  FIDUCIALUFIDUCIAL  [FIDUCIAL-MICRO]  134.11,67.82 0 bottom
FD255  FIDUCIALUFIDUCIAL  [FIDUCIAL-MICRO]  123.29,60.83 0 top
FD256  FIDUCIALUFIDUCIAL  [FIDUCIAL-MICRO]  123.29,60.83 0 bottom
FD257  FIDUCIALUFIDUCIAL  [FIDUCIAL-MICRO]  148.59,67.82 0 top
FD258  FIDUCIALUFIDUCIAL  [FIDUCIAL-MICRO]  148.59,67.82 0 bottom
FD259  FIDUCIALUFIDUCIAL  [FIDUCIAL-MICRO]  137.77,60.83 0 top
FD260  FIDUCIALUFIDUCIAL  [FIDUCIAL-MICRO]  137.77,60.83 0 bottom
FD261  FIDUCIALUFIDUCIAL  [FIDUCIAL-MICRO]  163.07,67.82 0 top
FD262  FIDUCIALUFIDUCIAL  [FIDUCIAL-MICRO]  163.07,67.82 0 bottom
FD263  FIDUCIALUFIDUCIAL  [FIDUCIAL-MICRO]  152.25,60.83 0 top
FD264  FIDUCIALUFIDUCIAL  [FIDUCIAL-MICRO]  152.25,60.83 0 bottom
FD265  FIDUCIALUFIDUCIAL  [FIDUCIAL-MICRO]  18.29,78.49 0 top
FD266  FIDUCIALUFIDUCIAL  [FIDUCIAL-MICRO]  18.29,78.49 0 bottom
FD267  FIDUCIALUFIDUCIAL  [FIDUCIAL-MICRO]  7.47,71.5 0 top
FD268  FIDUCIALUFIDUCIAL  [FIDUCIAL-MICRO]  7.47,71.5 0 bottom
FD269  FIDUCIALUFIDUCIAL  [FIDUCIAL-MICRO]  32.77,78.49 0 top
FD270  FIDUCIALUFIDUCIAL  [FIDUCIAL-MICRO]  32.77,78.49 0 bottom
FD271  FIDUCIALUFIDUCIAL  [FIDUCIAL-MICRO]  21.95,71.5 0 top
FD272  FIDUCIALUFIDUCIAL  [FIDUCIAL-MICRO]  21.95,71.5 0 bottom
FD273  FIDUCIALUFIDUCIAL  [FIDUCIAL-MICRO]  47.24,78.49 0 top
FD274  FIDUCIALUFIDUCIAL  [FIDUCIAL-MICRO]  47.24,78.49 0 bottom
FD275  FIDUCIALUFIDUCIAL  [FIDUCIAL-MICRO]  36.42,71.5 0 top
FD276  FIDUCIALUFIDUCIAL  [FIDUCIAL-MICRO]  36.42,71.5 0 bottom
FD277  FIDUCIALUFIDUCIAL  [FIDUCIAL-MICRO]  61.72,78.49 0 top
FD278  FIDUCIALUFIDUCIAL  [FIDUCIAL-MICRO]  61.72,78.49 0 bottom
FD279  FIDUCIALUFIDUCIAL  [FIDUCIAL-MICRO]  50.9,71.5 0 top
FD280  FIDUCIALUFIDUCIAL  [FIDUCIAL-MICRO]  50.9,71.5 0 bottom
FD281  FIDUCIALUFIDUCIAL  [FIDUCIAL-MICRO]  76.2,78.49 0 top
FD282  FIDUCIALUFIDUCIAL  [FIDUCIAL-MICRO]  76.2,78.49 0 bottom
FD283  FIDUCIALUFIDUCIAL  [FIDUCIAL-MICRO]  65.38,71.5 0 top
FD284  FIDUCIALUFIDUCIAL  [FIDUCIAL-MICRO]  65.38,71.5 0 bottom
FD285  FIDUCIALUFIDUCIAL  [FIDUCIAL-MICRO]  90.68,78.49 0 top
FD286  FIDUCIALUFIDUCIAL  [FIDUCIAL-MICRO]  90.68,78.49 0 bottom
FD287  FIDUCIALUFIDUCIAL  [FIDUCIAL-MICRO]  79.86,71.5 0 top
FD288  FIDUCIALUFIDUCIAL  [FIDUCIAL-MICRO]  79.86,71.5 0 bottom
FD289  FIDUCIALUFIDUCIAL  [FIDUCIAL-MICRO]  105.16,78.49 0 top
FD290  FIDUCIALUFIDUCIAL  [FIDUCIAL-MICRO]  105.16,78.49 0 bottom
FD291  FIDUCIALUFIDUCIAL  [FIDUCIAL-MICRO]  94.34,71.5 0 top
FD292  FIDUCIALUFIDUCIAL  [FIDUCIAL-MICRO]  94.34,71.5 0 bottom
FD293  FIDUCIALUFIDUCIAL  [FIDUCIAL-MICRO]  119.63,78.49 0 top
FD294  FIDUCIALUFIDUCIAL  [FIDUCIAL-MICRO]  119.63,78.49 0 bottom
FD295  FIDUCIALUFIDUCIAL  [FIDUCIAL-MICRO]  108.81,71.5 0 top
FD296  FIDUCIALUFIDUCIAL  [FIDUCIAL-MICRO]  108.81,71.5 0 bottom
FD297  FIDUCIALUFIDUCIAL  [FIDUCIAL-MICRO]  134.11,78.49 0 top
FD298  FIDUCIALUFIDUCIAL  [FIDUCIAL-MICRO]  134.11,78.49 0 bottom
FD299  FIDUCIALUFIDUCIAL  [FIDUCIAL-MICRO]  123.29,71.5 0 top
FD300  FIDUCIALUFIDUCIAL  [FIDUCIAL-MICRO]  123.29,71.5 0 bottom
FD301  FIDUCIALUFIDUCIAL  [FIDUCIAL-MICRO]  148.59,78.49 0 top
FD302  FIDUCIALUFIDUCIAL  [FIDUCIAL-MICRO]  148.59,78.49 0 bottom
FD303  FIDUCIALUFIDUCIAL  [FIDUCIAL-MICRO]  137.77,71.5 0 top
FD304  FIDUCIALUFIDUCIAL  [FIDUCIAL-MICRO]  137.77,71.5 0 bottom
FD305  FIDUCIALUFIDUCIAL  [FIDUCIAL-MICRO]  163.07,78.49 0 top
FD306  FIDUCIALUFIDUCIAL  [FIDUCIAL-MICRO]  163.07,78.49 0 bottom
FD307  FIDUCIALUFIDUCIAL  [FIDUCIAL-MICRO]  152.25,71.5 0 top
FD308  FIDUCIALUFIDUCIAL  [FIDUCIAL-MICRO]  152.25,71.5 0 bottom
FD309  FIDUCIALUFIDUCIAL  [FIDUCIAL-MICRO]  18.29,89.15 0 top
FD310  FIDUCIALUFIDUCIAL  [FIDUCIAL-MICRO]  18.29,89.15 0 bottom
FD311  FIDUCIALUFIDUCIAL  [FIDUCIAL-MICRO]  7.47,82.17 0 top
FD312  FIDUCIALUFIDUCIAL  [FIDUCIAL-MICRO]  7.47,82.17 0 bottom
FD313  FIDUCIALUFIDUCIAL  [FIDUCIAL-MICRO]  32.77,89.15 0 top
FD314  FIDUCIALUFIDUCIAL  [FIDUCIAL-MICRO]  32.77,89.15 0 bottom
FD315  FIDUCIALUFIDUCIAL  [FIDUCIAL-MICRO]  21.95,82.17 0 top
FD316  FIDUCIALUFIDUCIAL  [FIDUCIAL-MICRO]  21.95,82.17 0 bottom
FD317  FIDUCIALUFIDUCIAL  [FIDUCIAL-MICRO]  47.24,89.15 0 top
FD318  FIDUCIALUFIDUCIAL  [FIDUCIAL-MICRO]  47.24,89.15 0 bottom
FD319  FIDUCIALUFIDUCIAL  [FIDUCIAL-MICRO]  36.42,82.17 0 top
FD320  FIDUCIALUFIDUCIAL  [FIDUCIAL-MICRO]  36.42,82.17 0 bottom
FD321  FIDUCIALUFIDUCIAL  [FIDUCIAL-MICRO]  61.72,89.15 0 top
FD322  FIDUCIALUFIDUCIAL  [FIDUCIAL-MICRO]  61.72,89.15 0 bottom
FD323  FIDUCIALUFIDUCIAL  [FIDUCIAL-MICRO]  50.9,82.17 0 top
FD324  FIDUCIALUFIDUCIAL  [FIDUCIAL-MICRO]  50.9,82.17 0 bottom
FD325  FIDUCIALUFIDUCIAL  [FIDUCIAL-MICRO]  76.2,89.15 0 top
FD326  FIDUCIALUFIDUCIAL  [FIDUCIAL-MICRO]  76.2,89.15 0 bottom
FD327  FIDUCIALUFIDUCIAL  [FIDUCIAL-MICRO]  65.38,82.17 0 top
FD328  FIDUCIALUFIDUCIAL  [FIDUCIAL-MICRO]  65.38,82.17 0 bottom
FD329  FIDUCIALUFIDUCIAL  [FIDUCIAL-MICRO]  90.68,89.15 0 top
FD330  FIDUCIALUFIDUCIAL  [FIDUCIAL-MICRO]  90.68,89.15 0 bottom
FD331  FIDUCIALUFIDUCIAL  [FIDUCIAL-MICRO]  79.86,82.17 0 top
FD332  FIDUCIALUFIDUCIAL  [FIDUCIAL-MICRO]  79.86,82.17 0 bottom
FD333  FIDUCIALUFIDUCIAL  [FIDUCIAL-MICRO]  105.16,89.15 0 top
FD334  FIDUCIALUFIDUCIAL  [FIDUCIAL-MICRO]  105.16,89.15 0 bottom
FD335  FIDUCIALUFIDUCIAL  [FIDUCIAL-MICRO]  94.34,82.17 0 top
FD336  FIDUCIALUFIDUCIAL  [FIDUCIAL-MICRO]  94.34,82.17 0 bottom
FD337  FIDUCIALUFIDUCIAL  [FIDUCIAL-MICRO]  119.63,89.15 0 top
FD338  FIDUCIALUFIDUCIAL  [FIDUCIAL-MICRO]  119.63,89.15 0 bottom
FD339  FIDUCIALUFIDUCIAL  [FIDUCIAL-MICRO]  108.81,82.17 0 top
FD340  FIDUCIALUFIDUCIAL  [FIDUCIAL-MICRO]  108.81,82.17 0 bottom
FD341  FIDUCIALUFIDUCIAL  [FIDUCIAL-MICRO]  134.11,89.15 0 top
FD342  FIDUCIALUFIDUCIAL  [FIDUCIAL-MICRO]  134.11,89.15 0 bottom
FD343  FIDUCIALUFIDUCIAL  [FIDUCIAL-MICRO]  123.29,82.17 0 top
FD344  FIDUCIALUFIDUCIAL  [FIDUCIAL-MICRO]  123.29,82.17 0 bottom
FD345  FIDUCIALUFIDUCIAL  [FIDUCIAL-MICRO]  148.59,89.15 0 top
FD346  FIDUCIALUFIDUCIAL  [FIDUCIAL-MICRO]  148.59,89.15 0 bottom
FD347  FIDUCIALUFIDUCIAL  [FIDUCIAL-MICRO]  137.77,82.17 0 top
FD348  FIDUCIALUFIDUCIAL  [FIDUCIAL-MICRO]  137.77,82.17 0 bottom
FD349  FIDUCIALUFIDUCIAL  [FIDUCIAL-MICRO]  163.07,89.15 0 top
FD350  FIDUCIALUFIDUCIAL  [FIDUCIAL-MICRO]  163.07,89.15 0 bottom
FD351  FIDUCIALUFIDUCIAL  [FIDUCIAL-MICRO]  152.25,82.17 0 top
FD352  FIDUCIALUFIDUCIAL  [FIDUCIAL-MICRO]  152.25,82.17 0 bottom
FD353  FIDUCIALUFIDUCIAL  [FIDUCIAL-MICRO]  18.29,99.82 0 top
FD354  FIDUCIALUFIDUCIAL  [FIDUCIAL-MICRO]  18.29,99.82 0 bottom
FD355  FIDUCIALUFIDUCIAL  [FIDUCIAL-MICRO]  7.47,92.84 0 top
FD356  FIDUCIALUFIDUCIAL  [FIDUCIAL-MICRO]  7.47,92.84 0 bottom
FD357  FIDUCIALUFIDUCIAL  [FIDUCIAL-MICRO]  32.77,99.82 0 top
FD358  FIDUCIALUFIDUCIAL  [FIDUCIAL-MICRO]  32.77,99.82 0 bottom
FD359  FIDUCIALUFIDUCIAL  [FIDUCIAL-MICRO]  21.95,92.84 0 top
FD360  FIDUCIALUFIDUCIAL  [FIDUCIAL-MICRO]  21.95,92.84 0 bottom
FD361  FIDUCIALUFIDUCIAL  [FIDUCIAL-MICRO]  47.24,99.82 0 top
FD362  FIDUCIALUFIDUCIAL  [FIDUCIAL-MICRO]  47.24,99.82 0 bottom
FD363  FIDUCIALUFIDUCIAL  [FIDUCIAL-MICRO]  36.42,92.84 0 top
FD364  FIDUCIALUFIDUCIAL  [FIDUCIAL-MICRO]  36.42,92.84 0 bottom
FD365  FIDUCIALUFIDUCIAL  [FIDUCIAL-MICRO]  61.72,99.82 0 top
FD366  FIDUCIALUFIDUCIAL  [FIDUCIAL-MICRO]  61.72,99.82 0 bottom
FD367  FIDUCIALUFIDUCIAL  [FIDUCIAL-MICRO]  50.9,92.84 0 top
FD368  FIDUCIALUFIDUCIAL  [FIDUCIAL-MICRO]  50.9,92.84 0 bottom
FD369  FIDUCIALUFIDUCIAL  [FIDUCIAL-MICRO]  76.2,99.82 0 top
FD370  FIDUCIALUFIDUCIAL  [FIDUCIAL-MICRO]  76.2,99.82 0 bottom
FD371  FIDUCIALUFIDUCIAL  [FIDUCIAL-MICRO]  65.38,92.84 0 top
FD372  FIDUCIALUFIDUCIAL  [FIDUCIAL-MICRO]  65.38,92.84 0 bottom
FD373  FIDUCIALUFIDUCIAL  [FIDUCIAL-MICRO]  90.68,99.82 0 top
FD374  FIDUCIALUFIDUCIAL  [FIDUCIAL-MICRO]  90.68,99.82 0 bottom
FD375  FIDUCIALUFIDUCIAL  [FIDUCIAL-MICRO]  79.86,92.84 0 top
FD376  FIDUCIALUFIDUCIAL  [FIDUCIAL-MICRO]  79.86,92.84 0 bottom
FD377  FIDUCIALUFIDUCIAL  [FIDUCIAL-MICRO]  105.16,99.82 0 top
FD378  FIDUCIALUFIDUCIAL  [FIDUCIAL-MICRO]  105.16,99.82 0 bottom
FD379  FIDUCIALUFIDUCIAL  [FIDUCIAL-MICRO]  94.34,92.84 0 top
FD380  FIDUCIALUFIDUCIAL  [FIDUCIAL-MICRO]  94.34,92.84 0 bottom
FD381  FIDUCIALUFIDUCIAL  [FIDUCIAL-MICRO]  119.63,99.82 0 top
FD382  FIDUCIALUFIDUCIAL  [FIDUCIAL-MICRO]  119.63,99.82 0 bottom
FD383  FIDUCIALUFIDUCIAL  [FIDUCIAL-MICRO]  108.81,92.84 0 top
FD384  FIDUCIALUFIDUCIAL  [FIDUCIAL-MICRO]  108.81,92.84 0 bottom
FD385  FIDUCIALUFIDUCIAL  [FIDUCIAL-MICRO]  134.11,99.82 0 top
FD386  FIDUCIALUFIDUCIAL  [FIDUCIAL-MICRO]  134.11,99.82 0 bottom
FD387  FIDUCIALUFIDUCIAL  [FIDUCIAL-MICRO]  123.29,92.84 0 top
FD388  FIDUCIALUFIDUCIAL  [FIDUCIAL-MICRO]  123.29,92.84 0 bottom
FD389  FIDUCIALUFIDUCIAL  [FIDUCIAL-MICRO]  148.59,99.82 0 top
FD390  FIDUCIALUFIDUCIAL  [FIDUCIAL-MICRO]  148.59,99.82 0 bottom
FD391  FIDUCIALUFIDUCIAL  [FIDUCIAL-MICRO]  137.77,92.84 0 top
FD392  FIDUCIALUFIDUCIAL  [FIDUCIAL-MICRO]  137.77,92.84 0 bottom
FD393  FIDUCIALUFIDUCIAL  [FIDUCIAL-MICRO]  163.07,99.82 0 top
FD394  FIDUCIALUFIDUCIAL  [FIDUCIAL-MICRO]  163.07,99.82 0 bottom
FD395  FIDUCIALUFIDUCIAL  [FIDUCIAL-MICRO]  152.25,92.84 0 top
FD396  FIDUCIALUFIDUCIAL  [FIDUCIAL-MICRO]  152.25,92.84 0 bottom
FD397  FIDUCIALUFIDUCIAL  [FIDUCIAL-MICRO]  18.29,110.49 0 top
FD398  FIDUCIALUFIDUCIAL  [FIDUCIAL-MICRO]  18.29,110.49 0 bottom
FD399  FIDUCIALUFIDUCIAL  [FIDUCIAL-MICRO]  7.47,103.51 0 top
FD400  FIDUCIALUFIDUCIAL  [FIDUCIAL-MICRO]  7.47,103.51 0 bottom
FD401  FIDUCIALUFIDUCIAL  [FIDUCIAL-MICRO]  32.77,110.49 0 top
FD402  FIDUCIALUFIDUCIAL  [FIDUCIAL-MICRO]  32.77,110.49 0 bottom
FD403  FIDUCIALUFIDUCIAL  [FIDUCIAL-MICRO]  21.95,103.51 0 top
FD404  FIDUCIALUFIDUCIAL  [FIDUCIAL-MICRO]  21.95,103.51 0 bottom
FD405  FIDUCIALUFIDUCIAL  [FIDUCIAL-MICRO]  47.24,110.49 0 top
FD406  FIDUCIALUFIDUCIAL  [FIDUCIAL-MICRO]  47.24,110.49 0 bottom
FD407  FIDUCIALUFIDUCIAL  [FIDUCIAL-MICRO]  36.42,103.51 0 top
FD408  FIDUCIALUFIDUCIAL  [FIDUCIAL-MICRO]  36.42,103.51 0 bottom
FD409  FIDUCIALUFIDUCIAL  [FIDUCIAL-MICRO]  61.72,110.49 0 top
FD410  FIDUCIALUFIDUCIAL  [FIDUCIAL-MICRO]  61.72,110.49 0 bottom
FD411  FIDUCIALUFIDUCIAL  [FIDUCIAL-MICRO]  50.9,103.51 0 top
FD412  FIDUCIALUFIDUCIAL  [FIDUCIAL-MICRO]  50.9,103.51 0 bottom
FD413  FIDUCIALUFIDUCIAL  [FIDUCIAL-MICRO]  76.2,110.49 0 top
FD414  FIDUCIALUFIDUCIAL  [FIDUCIAL-MICRO]  76.2,110.49 0 bottom
FD415  FIDUCIALUFIDUCIAL  [FIDUCIAL-MICRO]  65.38,103.51 0 top
FD416  FIDUCIALUFIDUCIAL  [FIDUCIAL-MICRO]  65.38,103.51 0 bottom
FD417  FIDUCIALUFIDUCIAL  [FIDUCIAL-MICRO]  90.68,110.49 0 top
FD418  FIDUCIALUFIDUCIAL  [FIDUCIAL-MICRO]  90.68,110.49 0 bottom
FD419  FIDUCIALUFIDUCIAL  [FIDUCIAL-MICRO]  79.86,103.51 0 top
FD420  FIDUCIALUFIDUCIAL  [FIDUCIAL-MICRO]  79.86,103.51 0 bottom
FD421  FIDUCIALUFIDUCIAL  [FIDUCIAL-MICRO]  105.16,110.49 0 top
FD422  FIDUCIALUFIDUCIAL  [FIDUCIAL-MICRO]  105.16,110.49 0 bottom
FD423  FIDUCIALUFIDUCIAL  [FIDUCIAL-MICRO]  94.34,103.51 0 top
FD424  FIDUCIALUFIDUCIAL  [FIDUCIAL-MICRO]  94.34,103.51 0 bottom
FD425  FIDUCIALUFIDUCIAL  [FIDUCIAL-MICRO]  119.63,110.49 0 top
FD426  FIDUCIALUFIDUCIAL  [FIDUCIAL-MICRO]  119.63,110.49 0 bottom
FD427  FIDUCIALUFIDUCIAL  [FIDUCIAL-MICRO]  108.81,103.51 0 top
FD428  FIDUCIALUFIDUCIAL  [FIDUCIAL-MICRO]  108.81,103.51 0 bottom
FD429  FIDUCIALUFIDUCIAL  [FIDUCIAL-MICRO]  134.11,110.49 0 top
FD430  FIDUCIALUFIDUCIAL  [FIDUCIAL-MICRO]  134.11,110.49 0 bottom
FD431  FIDUCIALUFIDUCIAL  [FIDUCIAL-MICRO]  123.29,103.51 0 top
FD432  FIDUCIALUFIDUCIAL  [FIDUCIAL-MICRO]  123.29,103.51 0 bottom
FD433  FIDUCIALUFIDUCIAL  [FIDUCIAL-MICRO]  148.59,110.49 0 top
FD434  FIDUCIALUFIDUCIAL  [FIDUCIAL-MICRO]  148.59,110.49 0 bottom
FD435  FIDUCIALUFIDUCIAL  [FIDUCIAL-MICRO]  137.77,103.51 0 top
FD436  FIDUCIALUFIDUCIAL  [FIDUCIAL-MICRO]  137.77,103.51 0 bottom
FD437  FIDUCIALUFIDUCIAL  [FIDUCIAL-MICRO]  163.07,110.49 0 top
FD438  FIDUCIALUFIDUCIAL  [FIDUCIAL-MICRO]  163.07,110.49 0 bottom
FD439  FIDUCIALUFIDUCIAL  [FIDUCIAL-MICRO]  152.25,103.51 0 top
FD440  FIDUCIALUFIDUCIAL  [FIDUCIAL-MICRO]  152.25,103.51 0 bottom
J1  [1X04_NO_SILK]  19.56,8.13 90 top
J2  [1X04_NO_SILK]  34.04,8.13 90 top
J3  [1X04_NO_SILK]  48.51,8.13 90 top
J4  [1X04_NO_SILK]  62.99,8.13 90 top
J5  [1X04_NO_SILK]  77.47,8.13 90 top
J6  [1X04_NO_SILK]  91.95,8.13 90 top
J7  [1X04_NO_SILK]  106.43,8.13 90 top
J8  [1X04_NO_SILK]  120.9,8.13 90 top
J9  [1X04_NO_SILK]  135.38,8.13 90 top
J10  [1X04_NO_SILK]  149.86,8.13 90 top
J11  [1X04_NO_SILK]  164.34,8.13 90 top
J12  [1X04_NO_SILK]  19.56,18.8 90 top
J13  [1X04_NO_SILK]  34.04,18.8 90 top
J14  [1X04_NO_SILK]  48.51,18.8 90 top
J15  [1X04_NO_SILK]  62.99,18.8 90 top
J16  [1X04_NO_SILK]  77.47,18.8 90 top
J17  [1X04_NO_SILK]  91.95,18.8 90 top
J18  [1X04_NO_SILK]  106.43,18.8 90 top
J19  [1X04_NO_SILK]  120.9,18.8 90 top
J20  [1X04_NO_SILK]  135.38,18.8 90 top
J21  [1X04_NO_SILK]  149.86,18.8 90 top
J22  [1X04_NO_SILK]  164.34,18.8 90 top
J23  [1X04_NO_SILK]  19.56,29.46 90 top
J24  [1X04_NO_SILK]  34.04,29.46 90 top
J25  [1X04_NO_SILK]  48.51,29.46 90 top
J26  [1X04_NO_SILK]  62.99,29.46 90 top
J27  [1X04_NO_SILK]  77.47,29.46 90 top
J28  [1X04_NO_SILK]  91.95,29.46 90 top
J29  [1X04_NO_SILK]  106.43,29.46 90 top
J30  [1X04_NO_SILK]  120.9,29.46 90 top
J31  [1X04_NO_SILK]  135.38,29.46 90 top
J32  [1X04_NO_SILK]  149.86,29.46 90 top
J33  [1X04_NO_SILK]  164.34,29.46 90 top
J34  [1X04_NO_SILK]  19.56,40.13 90 top
J35  [1X04_NO_SILK]  34.04,40.13 90 top
J36  [1X04_NO_SILK]  48.51,40.13 90 top
J37  [1X04_NO_SILK]  62.99,40.13 90 top
J38  [1X04_NO_SILK]  77.47,40.13 90 top
J39  [1X04_NO_SILK]  91.95,40.13 90 top
J40  [1X04_NO_SILK]  106.43,40.13 90 top
J41  [1X04_NO_SILK]  120.9,40.13 90 top
J42  [1X04_NO_SILK]  135.38,40.13 90 top
J43  [1X04_NO_SILK]  149.86,40.13 90 top
J44  [1X04_NO_SILK]  164.34,40.13 90 top
J45  [1X04_NO_SILK]  19.56,50.8 90 top
J46  [1X04_NO_SILK]  34.04,50.8 90 top
J47  [1X04_NO_SILK]  48.51,50.8 90 top
J48  [1X04_NO_SILK]  62.99,50.8 90 top
J49  [1X04_NO_SILK]  77.47,50.8 90 top
J50  [1X04_NO_SILK]  91.95,50.8 90 top
J51  [1X04_NO_SILK]  106.43,50.8 90 top
J52  [1X04_NO_SILK]  120.9,50.8 90 top
J53  [1X04_NO_SILK]  135.38,50.8 90 top
J54  [1X04_NO_SILK]  149.86,50.8 90 top
J55  [1X04_NO_SILK]  164.34,50.8 90 top
J56  [1X04_NO_SILK]  19.56,61.47 90 top
J57  [1X04_NO_SILK]  34.04,61.47 90 top
J58  [1X04_NO_SILK]  48.51,61.47 90 top
J59  [1X04_NO_SILK]  62.99,61.47 90 top
J60  [1X04_NO_SILK]  77.47,61.47 90 top
J61  [1X04_NO_SILK]  91.95,61.47 90 top
J62  [1X04_NO_SILK]  106.43,61.47 90 top
J63  [1X04_NO_SILK]  120.9,61.47 90 top
J64  [1X04_NO_SILK]  135.38,61.47 90 top
J65  [1X04_NO_SILK]  149.86,61.47 90 top
J66  [1X04_NO_SILK]  164.34,61.47 90 top
J67  [1X04_NO_SILK]  19.56,72.14 90 top
J68  [1X04_NO_SILK]  34.04,72.14 90 top
J69  [1X04_NO_SILK]  48.51,72.14 90 top
J70  [1X04_NO_SILK]  62.99,72.14 90 top
J71  [1X04_NO_SILK]  77.47,72.14 90 top
J72  [1X04_NO_SILK]  91.95,72.14 90 top
J73  [1X04_NO_SILK]  106.43,72.14 90 top
J74  [1X04_NO_SILK]  120.9,72.14 90 top
J75  [1X04_NO_SILK]  135.38,72.14 90 top
J76  [1X04_NO_SILK]  149.86,72.14 90 top
J77  [1X04_NO_SILK]  164.34,72.14 90 top
J78  [1X04_NO_SILK]  19.56,82.8 90 top
J79  [1X04_NO_SILK]  34.04,82.8 90 top
J80  [1X04_NO_SILK]  48.51,82.8 90 top
J81  [1X04_NO_SILK]  62.99,82.8 90 top
J82  [1X04_NO_SILK]  77.47,82.8 90 top
J83  [1X04_NO_SILK]  91.95,82.8 90 top
J84  [1X04_NO_SILK]  106.43,82.8 90 top
J85  [1X04_NO_SILK]  120.9,82.8 90 top
J86  [1X04_NO_SILK]  135.38,82.8 90 top
J87  [1X04_NO_SILK]  149.86,82.8 90 top
J88  [1X04_NO_SILK]  164.34,82.8 90 top
J89  [1X04_NO_SILK]  19.56,93.47 90 top
J90  [1X04_NO_SILK]  34.04,93.47 90 top
J91  [1X04_NO_SILK]  48.51,93.47 90 top
J92  [1X04_NO_SILK]  62.99,93.47 90 top
J93  [1X04_NO_SILK]  77.47,93.47 90 top
J94  [1X04_NO_SILK]  91.95,93.47 90 top
J95  [1X04_NO_SILK]  106.43,93.47 90 top
J96  [1X04_NO_SILK]  120.9,93.47 90 top
J97  [1X04_NO_SILK]  135.38,93.47 90 top
J98  [1X04_NO_SILK]  149.86,93.47 90 top
J99  [1X04_NO_SILK]  164.34,93.47 90 top
J100  [1X04_NO_SILK]  19.56,104.14 90 top
J101  [1X04_NO_SILK]  34.04,104.14 90 top
J102  [1X04_NO_SILK]  48.51,104.14 90 top
J103  [1X04_NO_SILK]  62.99,104.14 90 top
J104  [1X04_NO_SILK]  77.47,104.14 90 top
J105  [1X04_NO_SILK]  91.95,104.14 90 top
J106  [1X04_NO_SILK]  106.43,104.14 90 top
J107  [1X04_NO_SILK]  120.9,104.14 90 top
J108  [1X04_NO_SILK]  135.38,104.14 90 top
J109  [1X04_NO_SILK]  149.86,104.14 90 top
J110  [1X04_NO_SILK]  164.34,104.14 90 top
LOGO1  SFE_LOGO_FLAME.1_INCH  [SFE_LOGO_FLAME_.1]  12.12,11.99 0 bottom
LOGO2  OSHW-LOGOMINI  [OSHW-LOGO-MINI]  9.4,11.94 0 bottom
LOGO3  SFE_LOGO_FLAME.1_INCH  [SFE_LOGO_FLAME_.1]  13.54,9.58 0 top
LOGO4  SFE_LOGO_FLAME.1_INCH  [SFE_LOGO_FLAME_.1]  26.59,11.99 0 bottom
LOGO5  OSHW-LOGOMINI  [OSHW-LOGO-MINI]  23.88,11.94 0 bottom
LOGO6  SFE_LOGO_FLAME.1_INCH  [SFE_LOGO_FLAME_.1]  28.01,9.58 0 top
LOGO7  SFE_LOGO_FLAME.1_INCH  [SFE_LOGO_FLAME_.1]  41.07,11.99 0 bottom
LOGO8  OSHW-LOGOMINI  [OSHW-LOGO-MINI]  38.35,11.94 0 bottom
LOGO9  SFE_LOGO_FLAME.1_INCH  [SFE_LOGO_FLAME_.1]  42.49,9.58 0 top
LOGO10  SFE_LOGO_FLAME.1_INCH  [SFE_LOGO_FLAME_.1]  55.55,11.99 0 bottom
LOGO11  OSHW-LOGOMINI  [OSHW-LOGO-MINI]  52.83,11.94 0 bottom
LOGO12  SFE_LOGO_FLAME.1_INCH  [SFE_LOGO_FLAME_.1]  56.97,9.58 0 top
LOGO13  SFE_LOGO_FLAME.1_INCH  [SFE_LOGO_FLAME_.1]  70.03,11.99 0 bottom
LOGO14  OSHW-LOGOMINI  [OSHW-LOGO-MINI]  67.31,11.94 0 bottom
LOGO15  SFE_LOGO_FLAME.1_INCH  [SFE_LOGO_FLAME_.1]  71.45,9.58 0 top
LOGO16  SFE_LOGO_FLAME.1_INCH  [SFE_LOGO_FLAME_.1]  84.51,11.99 0 bottom
LOGO17  OSHW-LOGOMINI  [OSHW-LOGO-MINI]  81.79,11.94 0 bottom
LOGO18  SFE_LOGO_FLAME.1_INCH  [SFE_LOGO_FLAME_.1]  85.93,9.58 0 top
LOGO19  SFE_LOGO_FLAME.1_INCH  [SFE_LOGO_FLAME_.1]  98.98,11.99 0 bottom
LOGO20  OSHW-LOGOMINI  [OSHW-LOGO-MINI]  96.27,11.94 0 bottom
LOGO21  SFE_LOGO_FLAME.1_INCH  [SFE_LOGO_FLAME_.1]  100.4,9.58 0 top
LOGO22  SFE_LOGO_FLAME.1_INCH  [SFE_LOGO_FLAME_.1]  113.46,11.99 0 bottom
LOGO23  OSHW-LOGOMINI  [OSHW-LOGO-MINI]  110.74,11.94 0 bottom
LOGO24  SFE_LOGO_FLAME.1_INCH  [SFE_LOGO_FLAME_.1]  114.88,9.58 0 top
LOGO25  SFE_LOGO_FLAME.1_INCH  [SFE_LOGO_FLAME_.1]  127.94,11.99 0 bottom
LOGO26  OSHW-LOGOMINI  [OSHW-LOGO-MINI]  125.22,11.94 0 bottom
LOGO27  SFE_LOGO_FLAME.1_INCH  [SFE_LOGO_FLAME_.1]  129.36,9.58 0 top
LOGO28  SFE_LOGO_FLAME.1_INCH  [SFE_LOGO_FLAME_.1]  142.42,11.99 0 bottom
LOGO29  OSHW-LOGOMINI  [OSHW-LOGO-MINI]  139.7,11.94 0 bottom
LOGO30  SFE_LOGO_FLAME.1_INCH  [SFE_LOGO_FLAME_.1]  143.84,9.58 0 top
LOGO31  SFE_LOGO_FLAME.1_INCH  [SFE_LOGO_FLAME_.1]  156.9,11.99 0 bottom
LOGO32  OSHW-LOGOMINI  [OSHW-LOGO-MINI]  154.18,11.94 0 bottom
LOGO33  SFE_LOGO_FLAME.1_INCH  [SFE_LOGO_FLAME_.1]  158.32,9.58 0 top
LOGO34  SFE_LOGO_FLAME.1_INCH  [SFE_LOGO_FLAME_.1]  12.12,22.66 0 bottom
LOGO35  OSHW-LOGOMINI  [OSHW-LOGO-MINI]  9.4,22.61 0 bottom
LOGO36  SFE_LOGO_FLAME.1_INCH  [SFE_LOGO_FLAME_.1]  13.54,20.24 0 top
LOGO37  SFE_LOGO_FLAME.1_INCH  [SFE_LOGO_FLAME_.1]  26.59,22.66 0 bottom
LOGO38  OSHW-LOGOMINI  [OSHW-LOGO-MINI]  23.88,22.61 0 bottom
LOGO39  SFE_LOGO_FLAME.1_INCH  [SFE_LOGO_FLAME_.1]  28.01,20.24 0 top
LOGO40  SFE_LOGO_FLAME.1_INCH  [SFE_LOGO_FLAME_.1]  41.07,22.66 0 bottom
LOGO41  OSHW-LOGOMINI  [OSHW-LOGO-MINI]  38.35,22.61 0 bottom
LOGO42  SFE_LOGO_FLAME.1_INCH  [SFE_LOGO_FLAME_.1]  42.49,20.24 0 top
LOGO43  SFE_LOGO_FLAME.1_INCH  [SFE_LOGO_FLAME_.1]  55.55,22.66 0 bottom
LOGO44  OSHW-LOGOMINI  [OSHW-LOGO-MINI]  52.83,22.61 0 bottom
LOGO45  SFE_LOGO_FLAME.1_INCH  [SFE_LOGO_FLAME_.1]  56.97,20.24 0 top
LOGO46  SFE_LOGO_FLAME.1_INCH  [SFE_LOGO_FLAME_.1]  70.03,22.66 0 bottom
LOGO47  OSHW-LOGOMINI  [OSHW-LOGO-MINI]  67.31,22.61 0 bottom
LOGO48  SFE_LOGO_FLAME.1_INCH  [SFE_LOGO_FLAME_.1]  71.45,20.24 0 top
LOGO49  SFE_LOGO_FLAME.1_INCH  [SFE_LOGO_FLAME_.1]  84.51,22.66 0 bottom
LOGO50  OSHW-LOGOMINI  [OSHW-LOGO-MINI]  81.79,22.61 0 bottom
LOGO51  SFE_LOGO_FLAME.1_INCH  [SFE_LOGO_FLAME_.1]  85.93,20.24 0 top
LOGO52  SFE_LOGO_FLAME.1_INCH  [SFE_LOGO_FLAME_.1]  98.98,22.66 0 bottom
LOGO53  OSHW-LOGOMINI  [OSHW-LOGO-MINI]  96.27,22.61 0 bottom
LOGO54  SFE_LOGO_FLAME.1_INCH  [SFE_LOGO_FLAME_.1]  100.4,20.24 0 top
LOGO55  SFE_LOGO_FLAME.1_INCH  [SFE_LOGO_FLAME_.1]  113.46,22.66 0 bottom
LOGO56  OSHW-LOGOMINI  [OSHW-LOGO-MINI]  110.74,22.61 0 bottom
LOGO57  SFE_LOGO_FLAME.1_INCH  [SFE_LOGO_FLAME_.1]  114.88,20.24 0 top
LOGO58  SFE_LOGO_FLAME.1_INCH  [SFE_LOGO_FLAME_.1]  127.94,22.66 0 bottom
LOGO59  OSHW-LOGOMINI  [OSHW-LOGO-MINI]  125.22,22.61 0 bottom
LOGO60  SFE_LOGO_FLAME.1_INCH  [SFE_LOGO_FLAME_.1]  129.36,20.24 0 top
LOGO61  SFE_LOGO_FLAME.1_INCH  [SFE_LOGO_FLAME_.1]  142.42,22.66 0 bottom
LOGO62  OSHW-LOGOMINI  [OSHW-LOGO-MINI]  139.7,22.61 0 bottom
LOGO63  SFE_LOGO_FLAME.1_INCH  [SFE_LOGO_FLAME_.1]  143.84,20.24 0 top
LOGO64  SFE_LOGO_FLAME.1_INCH  [SFE_LOGO_FLAME_.1]  156.9,22.66 0 bottom
LOGO65  OSHW-LOGOMINI  [OSHW-LOGO-MINI]  154.18,22.61 0 bottom
LOGO66  SFE_LOGO_FLAME.1_INCH  [SFE_LOGO_FLAME_.1]  158.32,20.24 0 top
LOGO67  SFE_LOGO_FLAME.1_INCH  [SFE_LOGO_FLAME_.1]  12.12,33.33 0 bottom
LOGO68  OSHW-LOGOMINI  [OSHW-LOGO-MINI]  9.4,33.27 0 bottom
LOGO69  SFE_LOGO_FLAME.1_INCH  [SFE_LOGO_FLAME_.1]  13.54,30.91 0 top
LOGO70  SFE_LOGO_FLAME.1_INCH  [SFE_LOGO_FLAME_.1]  26.59,33.33 0 bottom
LOGO71  OSHW-LOGOMINI  [OSHW-LOGO-MINI]  23.88,33.27 0 bottom
LOGO72  SFE_LOGO_FLAME.1_INCH  [SFE_LOGO_FLAME_.1]  28.01,30.91 0 top
LOGO73  SFE_LOGO_FLAME.1_INCH  [SFE_LOGO_FLAME_.1]  41.07,33.33 0 bottom
LOGO74  OSHW-LOGOMINI  [OSHW-LOGO-MINI]  38.35,33.27 0 bottom
LOGO75  SFE_LOGO_FLAME.1_INCH  [SFE_LOGO_FLAME_.1]  42.49,30.91 0 top
LOGO76  SFE_LOGO_FLAME.1_INCH  [SFE_LOGO_FLAME_.1]  55.55,33.33 0 bottom
LOGO77  OSHW-LOGOMINI  [OSHW-LOGO-MINI]  52.83,33.27 0 bottom
LOGO78  SFE_LOGO_FLAME.1_INCH  [SFE_LOGO_FLAME_.1]  56.97,30.91 0 top
LOGO79  SFE_LOGO_FLAME.1_INCH  [SFE_LOGO_FLAME_.1]  70.03,33.33 0 bottom
LOGO80  OSHW-LOGOMINI  [OSHW-LOGO-MINI]  67.31,33.27 0 bottom
LOGO81  SFE_LOGO_FLAME.1_INCH  [SFE_LOGO_FLAME_.1]  71.45,30.91 0 top
LOGO82  SFE_LOGO_FLAME.1_INCH  [SFE_LOGO_FLAME_.1]  84.51,33.33 0 bottom
LOGO83  OSHW-LOGOMINI  [OSHW-LOGO-MINI]  81.79,33.27 0 bottom
LOGO84  SFE_LOGO_FLAME.1_INCH  [SFE_LOGO_FLAME_.1]  85.93,30.91 0 top
LOGO85  SFE_LOGO_FLAME.1_INCH  [SFE_LOGO_FLAME_.1]  98.98,33.33 0 bottom
LOGO86  OSHW-LOGOMINI  [OSHW-LOGO-MINI]  96.27,33.27 0 bottom
LOGO87  SFE_LOGO_FLAME.1_INCH  [SFE_LOGO_FLAME_.1]  100.4,30.91 0 top
LOGO88  SFE_LOGO_FLAME.1_INCH  [SFE_LOGO_FLAME_.1]  113.46,33.33 0 bottom
LOGO89  OSHW-LOGOMINI  [OSHW-LOGO-MINI]  110.74,33.27 0 bottom
LOGO90  SFE_LOGO_FLAME.1_INCH  [SFE_LOGO_FLAME_.1]  114.88,30.91 0 top
LOGO91  SFE_LOGO_FLAME.1_INCH  [SFE_LOGO_FLAME_.1]  127.94,33.33 0 bottom
LOGO92  OSHW-LOGOMINI  [OSHW-LOGO-MINI]  125.22,33.27 0 bottom
LOGO93  SFE_LOGO_FLAME.1_INCH  [SFE_LOGO_FLAME_.1]  129.36,30.91 0 top
LOGO94  SFE_LOGO_FLAME.1_INCH  [SFE_LOGO_FLAME_.1]  142.42,33.33 0 bottom
LOGO95  OSHW-LOGOMINI  [OSHW-LOGO-MINI]  139.7,33.27 0 bottom
LOGO96  SFE_LOGO_FLAME.1_INCH  [SFE_LOGO_FLAME_.1]  143.84,30.91 0 top
LOGO97  SFE_LOGO_FLAME.1_INCH  [SFE_LOGO_FLAME_.1]  156.9,33.33 0 bottom
LOGO98  OSHW-LOGOMINI  [OSHW-LOGO-MINI]  154.18,33.27 0 bottom
LOGO99  SFE_LOGO_FLAME.1_INCH  [SFE_LOGO_FLAME_.1]  158.32,30.91 0 top
LOGO100  SFE_LOGO_FLAME.1_INCH  [SFE_LOGO_FLAME_.1]  12.12,44 0 bottom
LOGO101  OSHW-LOGOMINI  [OSHW-LOGO-MINI]  9.4,43.94 0 bottom
LOGO102  SFE_LOGO_FLAME.1_INCH  [SFE_LOGO_FLAME_.1]  13.54,41.58 0 top
LOGO103  SFE_LOGO_FLAME.1_INCH  [SFE_LOGO_FLAME_.1]  26.59,44 0 bottom
LOGO104  OSHW-LOGOMINI  [OSHW-LOGO-MINI]  23.88,43.94 0 bottom
LOGO105  SFE_LOGO_FLAME.1_INCH  [SFE_LOGO_FLAME_.1]  28.01,41.58 0 top
LOGO106  SFE_LOGO_FLAME.1_INCH  [SFE_LOGO_FLAME_.1]  41.07,44 0 bottom
LOGO107  OSHW-LOGOMINI  [OSHW-LOGO-MINI]  38.35,43.94 0 bottom
LOGO108  SFE_LOGO_FLAME.1_INCH  [SFE_LOGO_FLAME_.1]  42.49,41.58 0 top
LOGO109  SFE_LOGO_FLAME.1_INCH  [SFE_LOGO_FLAME_.1]  55.55,44 0 bottom
LOGO110  OSHW-LOGOMINI  [OSHW-LOGO-MINI]  52.83,43.94 0 bottom
LOGO111  SFE_LOGO_FLAME.1_INCH  [SFE_LOGO_FLAME_.1]  56.97,41.58 0 top
LOGO112  SFE_LOGO_FLAME.1_INCH  [SFE_LOGO_FLAME_.1]  70.03,44 0 bottom
LOGO113  OSHW-LOGOMINI  [OSHW-LOGO-MINI]  67.31,43.94 0 bottom
LOGO114  SFE_LOGO_FLAME.1_INCH  [SFE_LOGO_FLAME_.1]  71.45,41.58 0 top
LOGO115  SFE_LOGO_FLAME.1_INCH  [SFE_LOGO_FLAME_.1]  84.51,44 0 bottom
LOGO116  OSHW-LOGOMINI  [OSHW-LOGO-MINI]  81.79,43.94 0 bottom
LOGO117  SFE_LOGO_FLAME.1_INCH  [SFE_LOGO_FLAME_.1]  85.93,41.58 0 top
LOGO118  SFE_LOGO_FLAME.1_INCH  [SFE_LOGO_FLAME_.1]  98.98,44 0 bottom
LOGO119  OSHW-LOGOMINI  [OSHW-LOGO-MINI]  96.27,43.94 0 bottom
LOGO120  SFE_LOGO_FLAME.1_INCH  [SFE_LOGO_FLAME_.1]  100.4,41.58 0 top
LOGO121  SFE_LOGO_FLAME.1_INCH  [SFE_LOGO_FLAME_.1]  113.46,44 0 bottom
LOGO122  OSHW-LOGOMINI  [OSHW-LOGO-MINI]  110.74,43.94 0 bottom
LOGO123  SFE_LOGO_FLAME.1_INCH  [SFE_LOGO_FLAME_.1]  114.88,41.58 0 top
LOGO124  SFE_LOGO_FLAME.1_INCH  [SFE_LOGO_FLAME_.1]  127.94,44 0 bottom
LOGO125  OSHW-LOGOMINI  [OSHW-LOGO-MINI]  125.22,43.94 0 bottom
LOGO126  SFE_LOGO_FLAME.1_INCH  [SFE_LOGO_FLAME_.1]  129.36,41.58 0 top
LOGO127  SFE_LOGO_FLAME.1_INCH  [SFE_LOGO_FLAME_.1]  142.42,44 0 bottom
LOGO128  OSHW-LOGOMINI  [OSHW-LOGO-MINI]  139.7,43.94 0 bottom
LOGO129  SFE_LOGO_FLAME.1_INCH  [SFE_LOGO_FLAME_.1]  143.84,41.58 0 top
LOGO130  SFE_LOGO_FLAME.1_INCH  [SFE_LOGO_FLAME_.1]  156.9,44 0 bottom
LOGO131  OSHW-LOGOMINI  [OSHW-LOGO-MINI]  154.18,43.94 0 bottom
LOGO132  SFE_LOGO_FLAME.1_INCH  [SFE_LOGO_FLAME_.1]  158.32,41.58 0 top
LOGO133  SFE_LOGO_FLAME.1_INCH  [SFE_LOGO_FLAME_.1]  12.12,54.66 0 bottom
LOGO134  OSHW-LOGOMINI  [OSHW-LOGO-MINI]  9.4,54.61 0 bottom
LOGO135  SFE_LOGO_FLAME.1_INCH  [SFE_LOGO_FLAME_.1]  13.54,52.25 0 top
LOGO136  SFE_LOGO_FLAME.1_INCH  [SFE_LOGO_FLAME_.1]  26.59,54.66 0 bottom
LOGO137  OSHW-LOGOMINI  [OSHW-LOGO-MINI]  23.88,54.61 0 bottom
LOGO138  SFE_LOGO_FLAME.1_INCH  [SFE_LOGO_FLAME_.1]  28.01,52.25 0 top
LOGO139  SFE_LOGO_FLAME.1_INCH  [SFE_LOGO_FLAME_.1]  41.07,54.66 0 bottom
LOGO140  OSHW-LOGOMINI  [OSHW-LOGO-MINI]  38.35,54.61 0 bottom
LOGO141  SFE_LOGO_FLAME.1_INCH  [SFE_LOGO_FLAME_.1]  42.49,52.25 0 top
LOGO142  SFE_LOGO_FLAME.1_INCH  [SFE_LOGO_FLAME_.1]  55.55,54.66 0 bottom
LOGO143  OSHW-LOGOMINI  [OSHW-LOGO-MINI]  52.83,54.61 0 bottom
LOGO144  SFE_LOGO_FLAME.1_INCH  [SFE_LOGO_FLAME_.1]  56.97,52.25 0 top
LOGO145  SFE_LOGO_FLAME.1_INCH  [SFE_LOGO_FLAME_.1]  70.03,54.66 0 bottom
LOGO146  OSHW-LOGOMINI  [OSHW-LOGO-MINI]  67.31,54.61 0 bottom
LOGO147  SFE_LOGO_FLAME.1_INCH  [SFE_LOGO_FLAME_.1]  71.45,52.25 0 top
LOGO148  SFE_LOGO_FLAME.1_INCH  [SFE_LOGO_FLAME_.1]  84.51,54.66 0 bottom
LOGO149  OSHW-LOGOMINI  [OSHW-LOGO-MINI]  81.79,54.61 0 bottom
LOGO150  SFE_LOGO_FLAME.1_INCH  [SFE_LOGO_FLAME_.1]  85.93,52.25 0 top
LOGO151  SFE_LOGO_FLAME.1_INCH  [SFE_LOGO_FLAME_.1]  98.98,54.66 0 bottom
LOGO152  OSHW-LOGOMINI  [OSHW-LOGO-MINI]  96.27,54.61 0 bottom
LOGO153  SFE_LOGO_FLAME.1_INCH  [SFE_LOGO_FLAME_.1]  100.4,52.25 0 top
LOGO154  SFE_LOGO_FLAME.1_INCH  [SFE_LOGO_FLAME_.1]  113.46,54.66 0 bottom
LOGO155  OSHW-LOGOMINI  [OSHW-LOGO-MINI]  110.74,54.61 0 bottom
LOGO156  SFE_LOGO_FLAME.1_INCH  [SFE_LOGO_FLAME_.1]  114.88,52.25 0 top
LOGO157  SFE_LOGO_FLAME.1_INCH  [SFE_LOGO_FLAME_.1]  127.94,54.66 0 bottom
LOGO158  OSHW-LOGOMINI  [OSHW-LOGO-MINI]  125.22,54.61 0 bottom
LOGO159  SFE_LOGO_FLAME.1_INCH  [SFE_LOGO_FLAME_.1]  129.36,52.25 0 top
LOGO160  SFE_LOGO_FLAME.1_INCH  [SFE_LOGO_FLAME_.1]  142.42,54.66 0 bottom
LOGO161  OSHW-LOGOMINI  [OSHW-LOGO-MINI]  139.7,54.61 0 bottom
LOGO162  SFE_LOGO_FLAME.1_INCH  [SFE_LOGO_FLAME_.1]  143.84,52.25 0 top
LOGO163  SFE_LOGO_FLAME.1_INCH  [SFE_LOGO_FLAME_.1]  156.9,54.66 0 bottom
LOGO164  OSHW-LOGOMINI  [OSHW-LOGO-MINI]  154.18,54.61 0 bottom
LOGO165  SFE_LOGO_FLAME.1_INCH  [SFE_LOGO_FLAME_.1]  158.32,52.25 0 top
LOGO166  SFE_LOGO_FLAME.1_INCH  [SFE_LOGO_FLAME_.1]  12.12,65.33 0 bottom
LOGO167  OSHW-LOGOMINI  [OSHW-LOGO-MINI]  9.4,65.28 0 bottom
LOGO168  SFE_LOGO_FLAME.1_INCH  [SFE_LOGO_FLAME_.1]  13.54,62.92 0 top
LOGO169  SFE_LOGO_FLAME.1_INCH  [SFE_LOGO_FLAME_.1]  26.59,65.33 0 bottom